# Altium PCB ESP32P4 SOM.PcbDoc (part 1 of 4)
Units mm, origin at the board's own origin, x right, y up, seen from the top; angles counter-clockwise.
Board outline 86.37 x 63.05 mm, 4 copper layers (L1-TOP, L2-GND, L3-GND/PWR, L4-BOT), stack 1.57 mm thick; 203 components, 172 nets, 736 pads, 1001 vias.
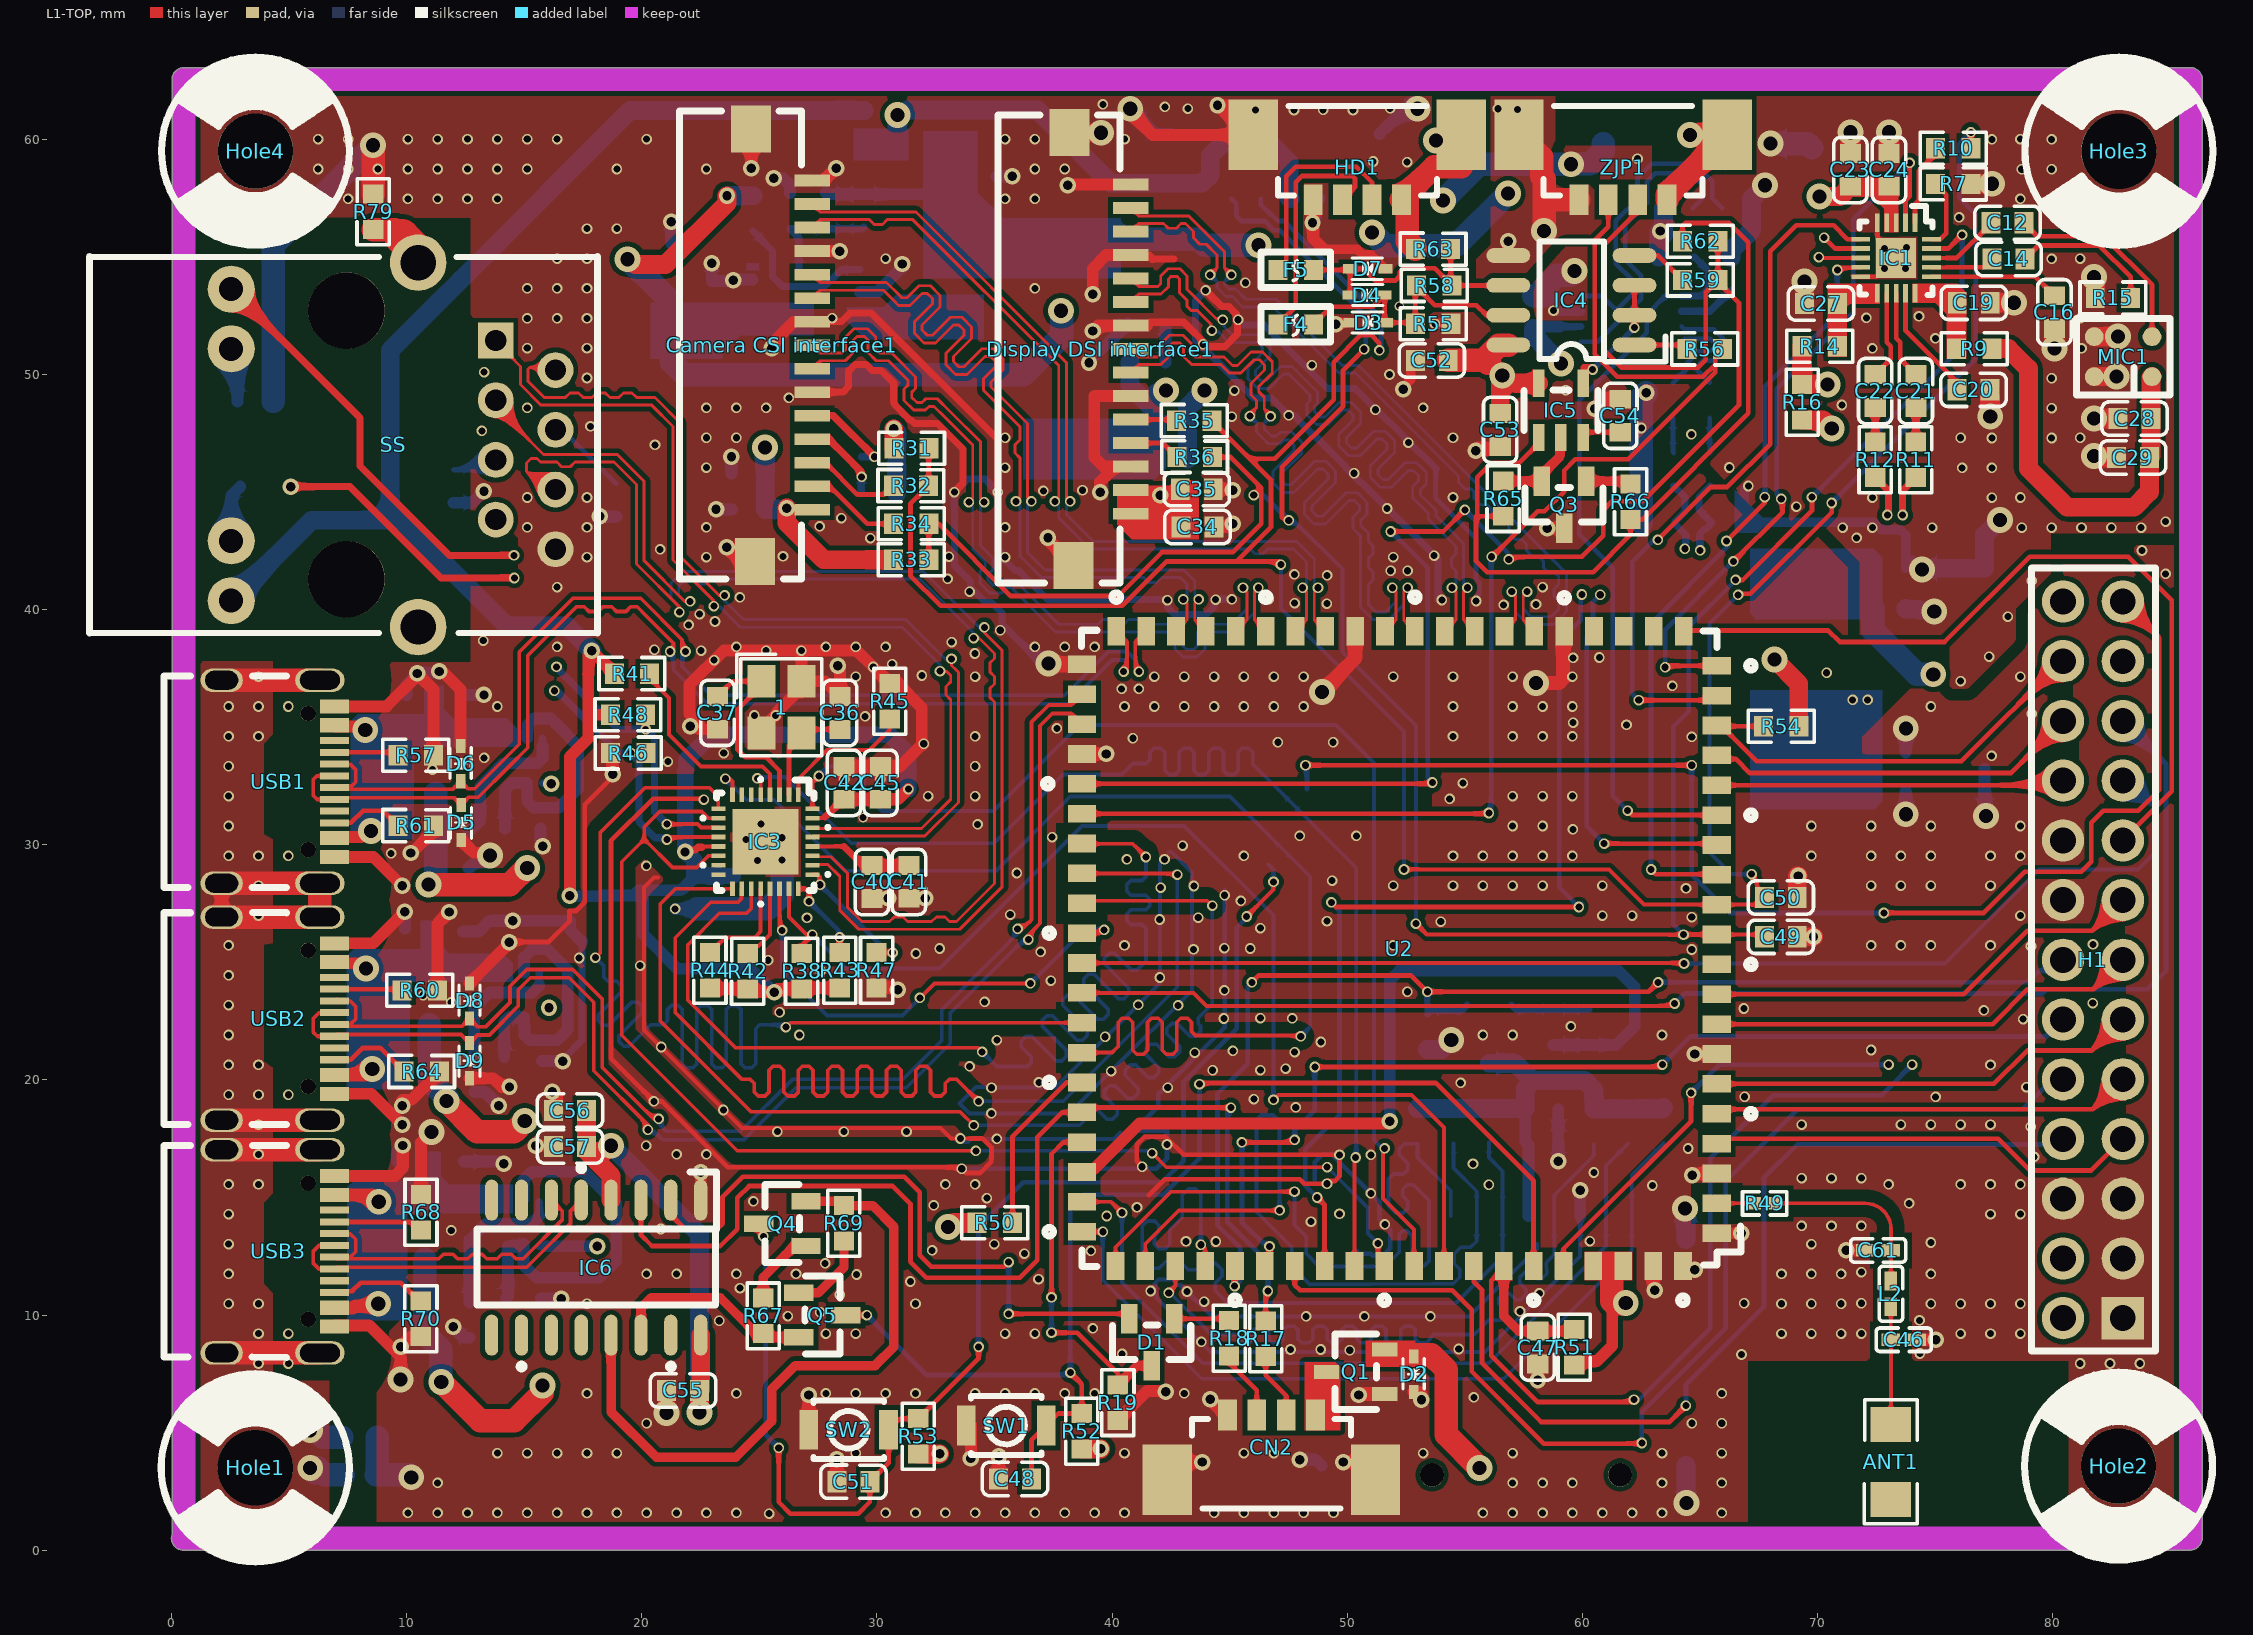
[diagram p0: L1-TOP view]
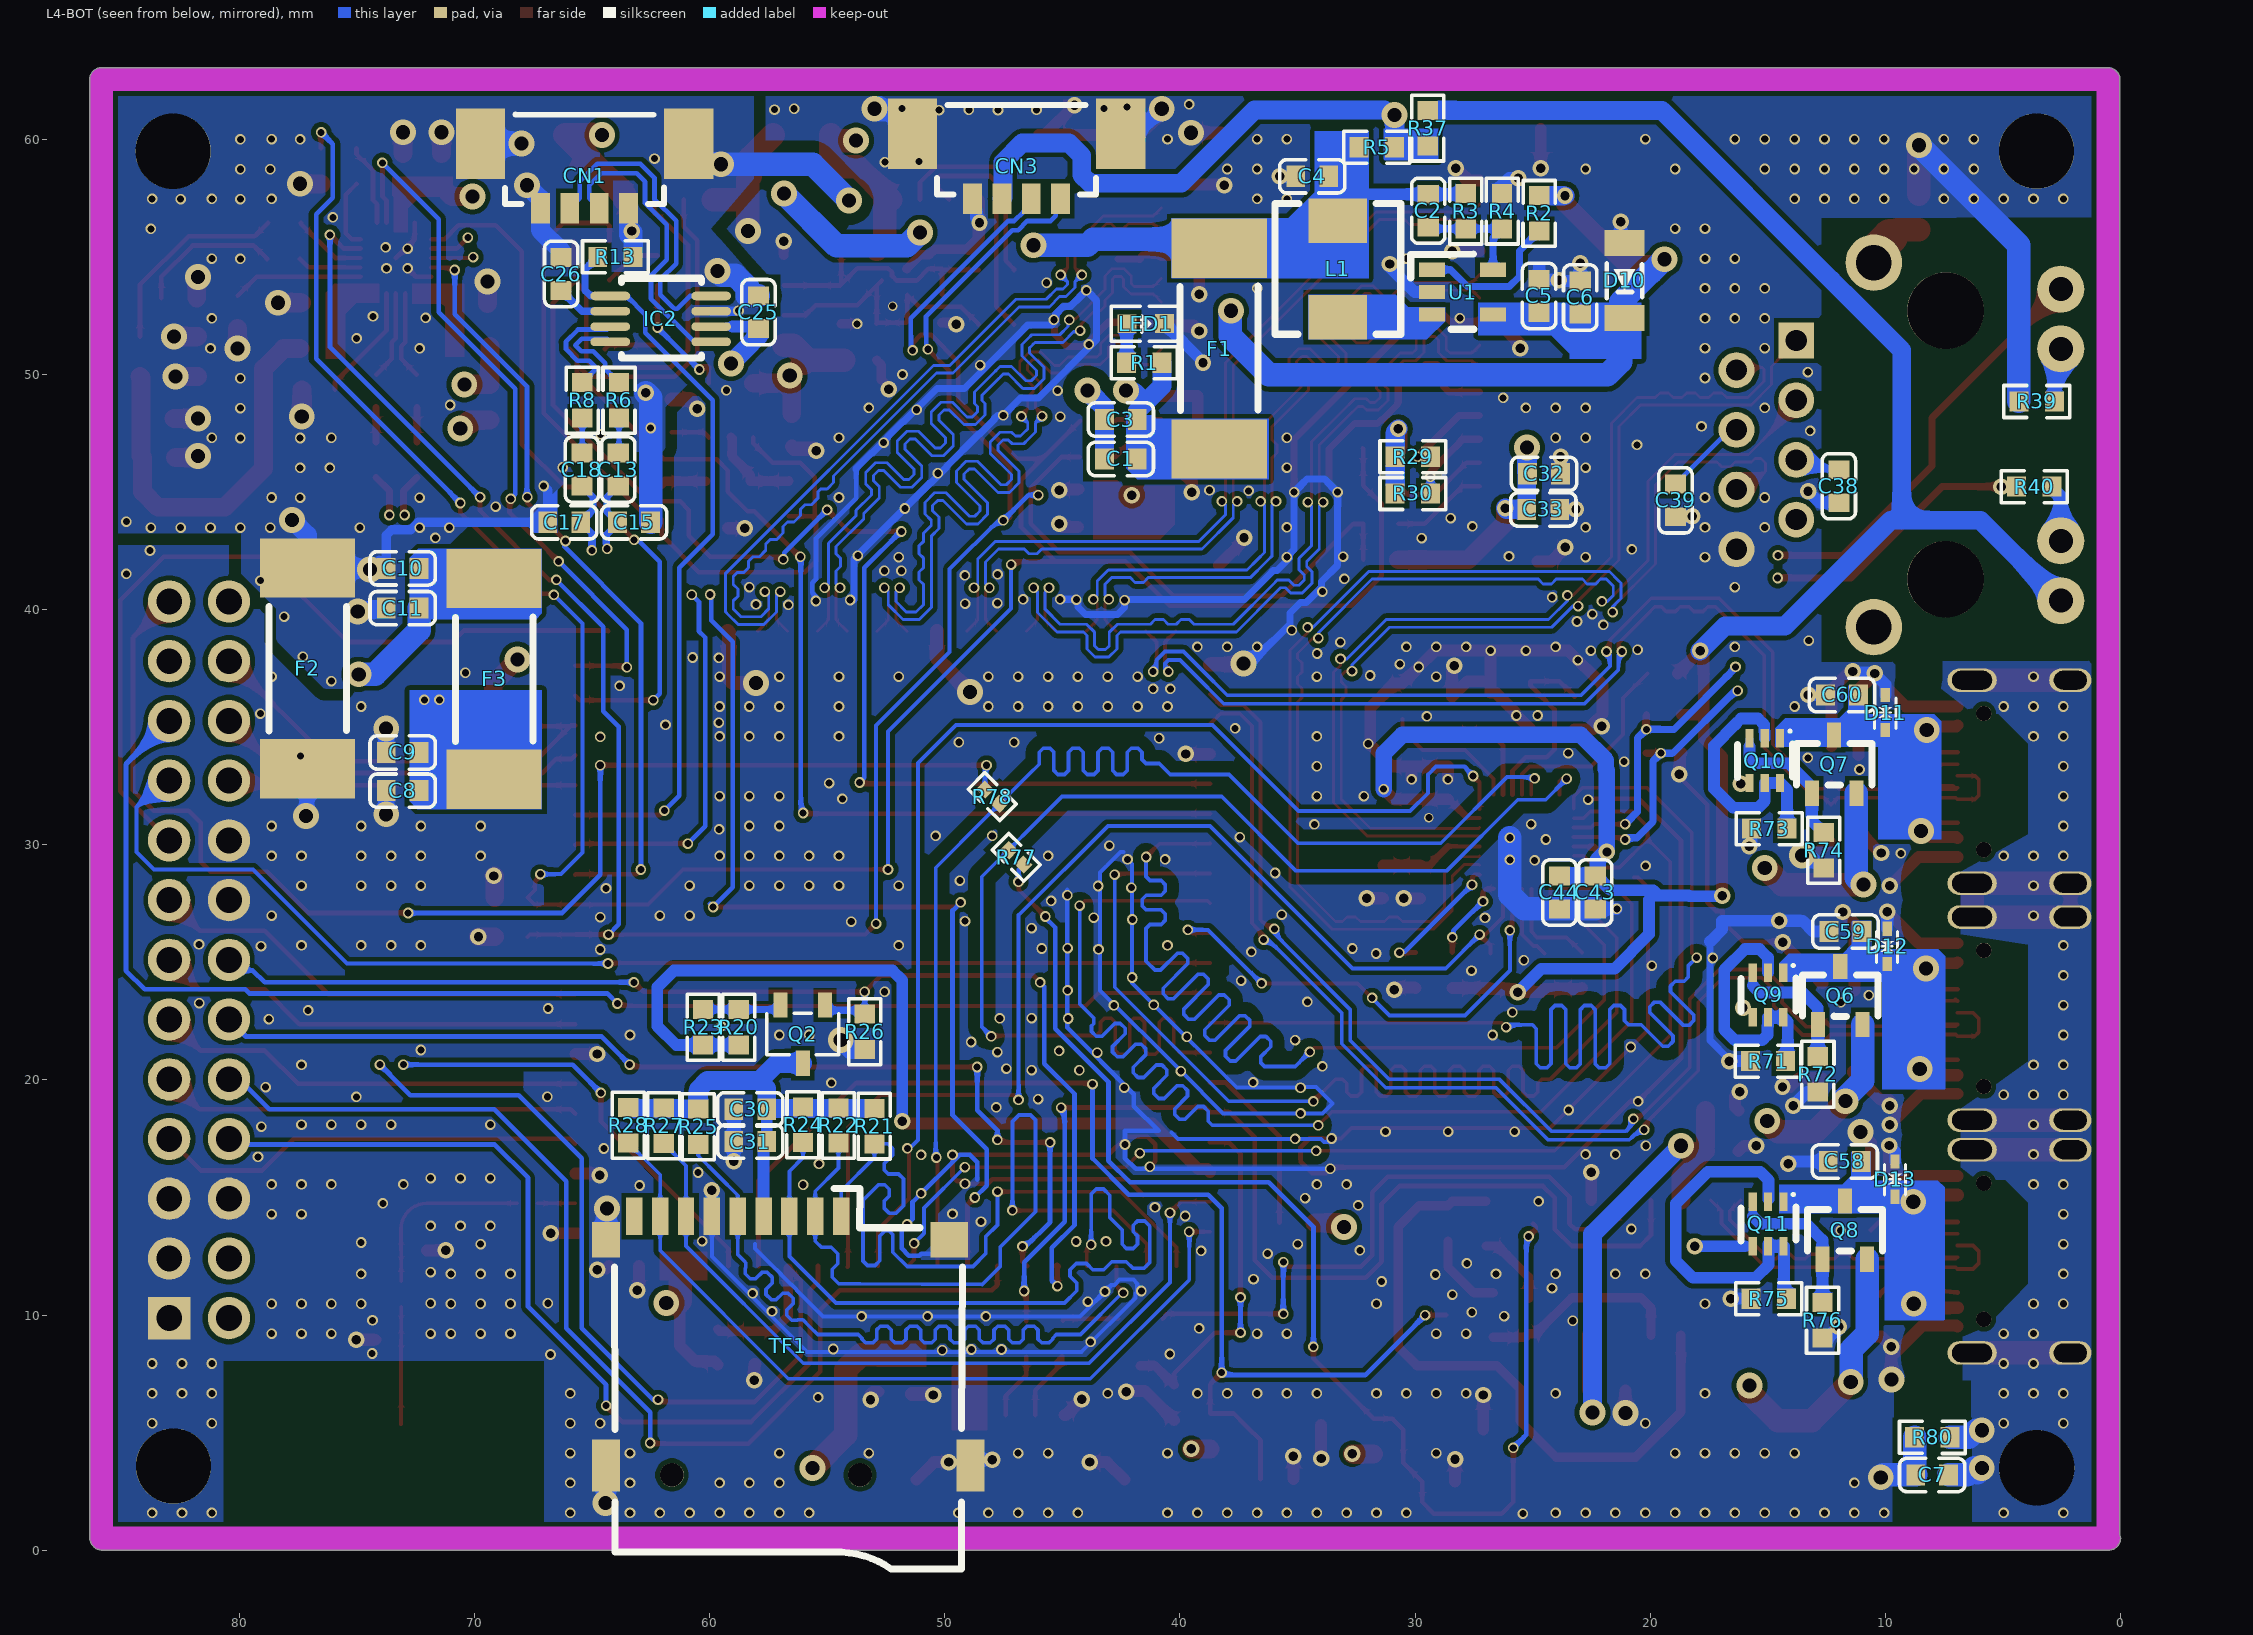
[diagram p1: L4-BOT view, seen from below]
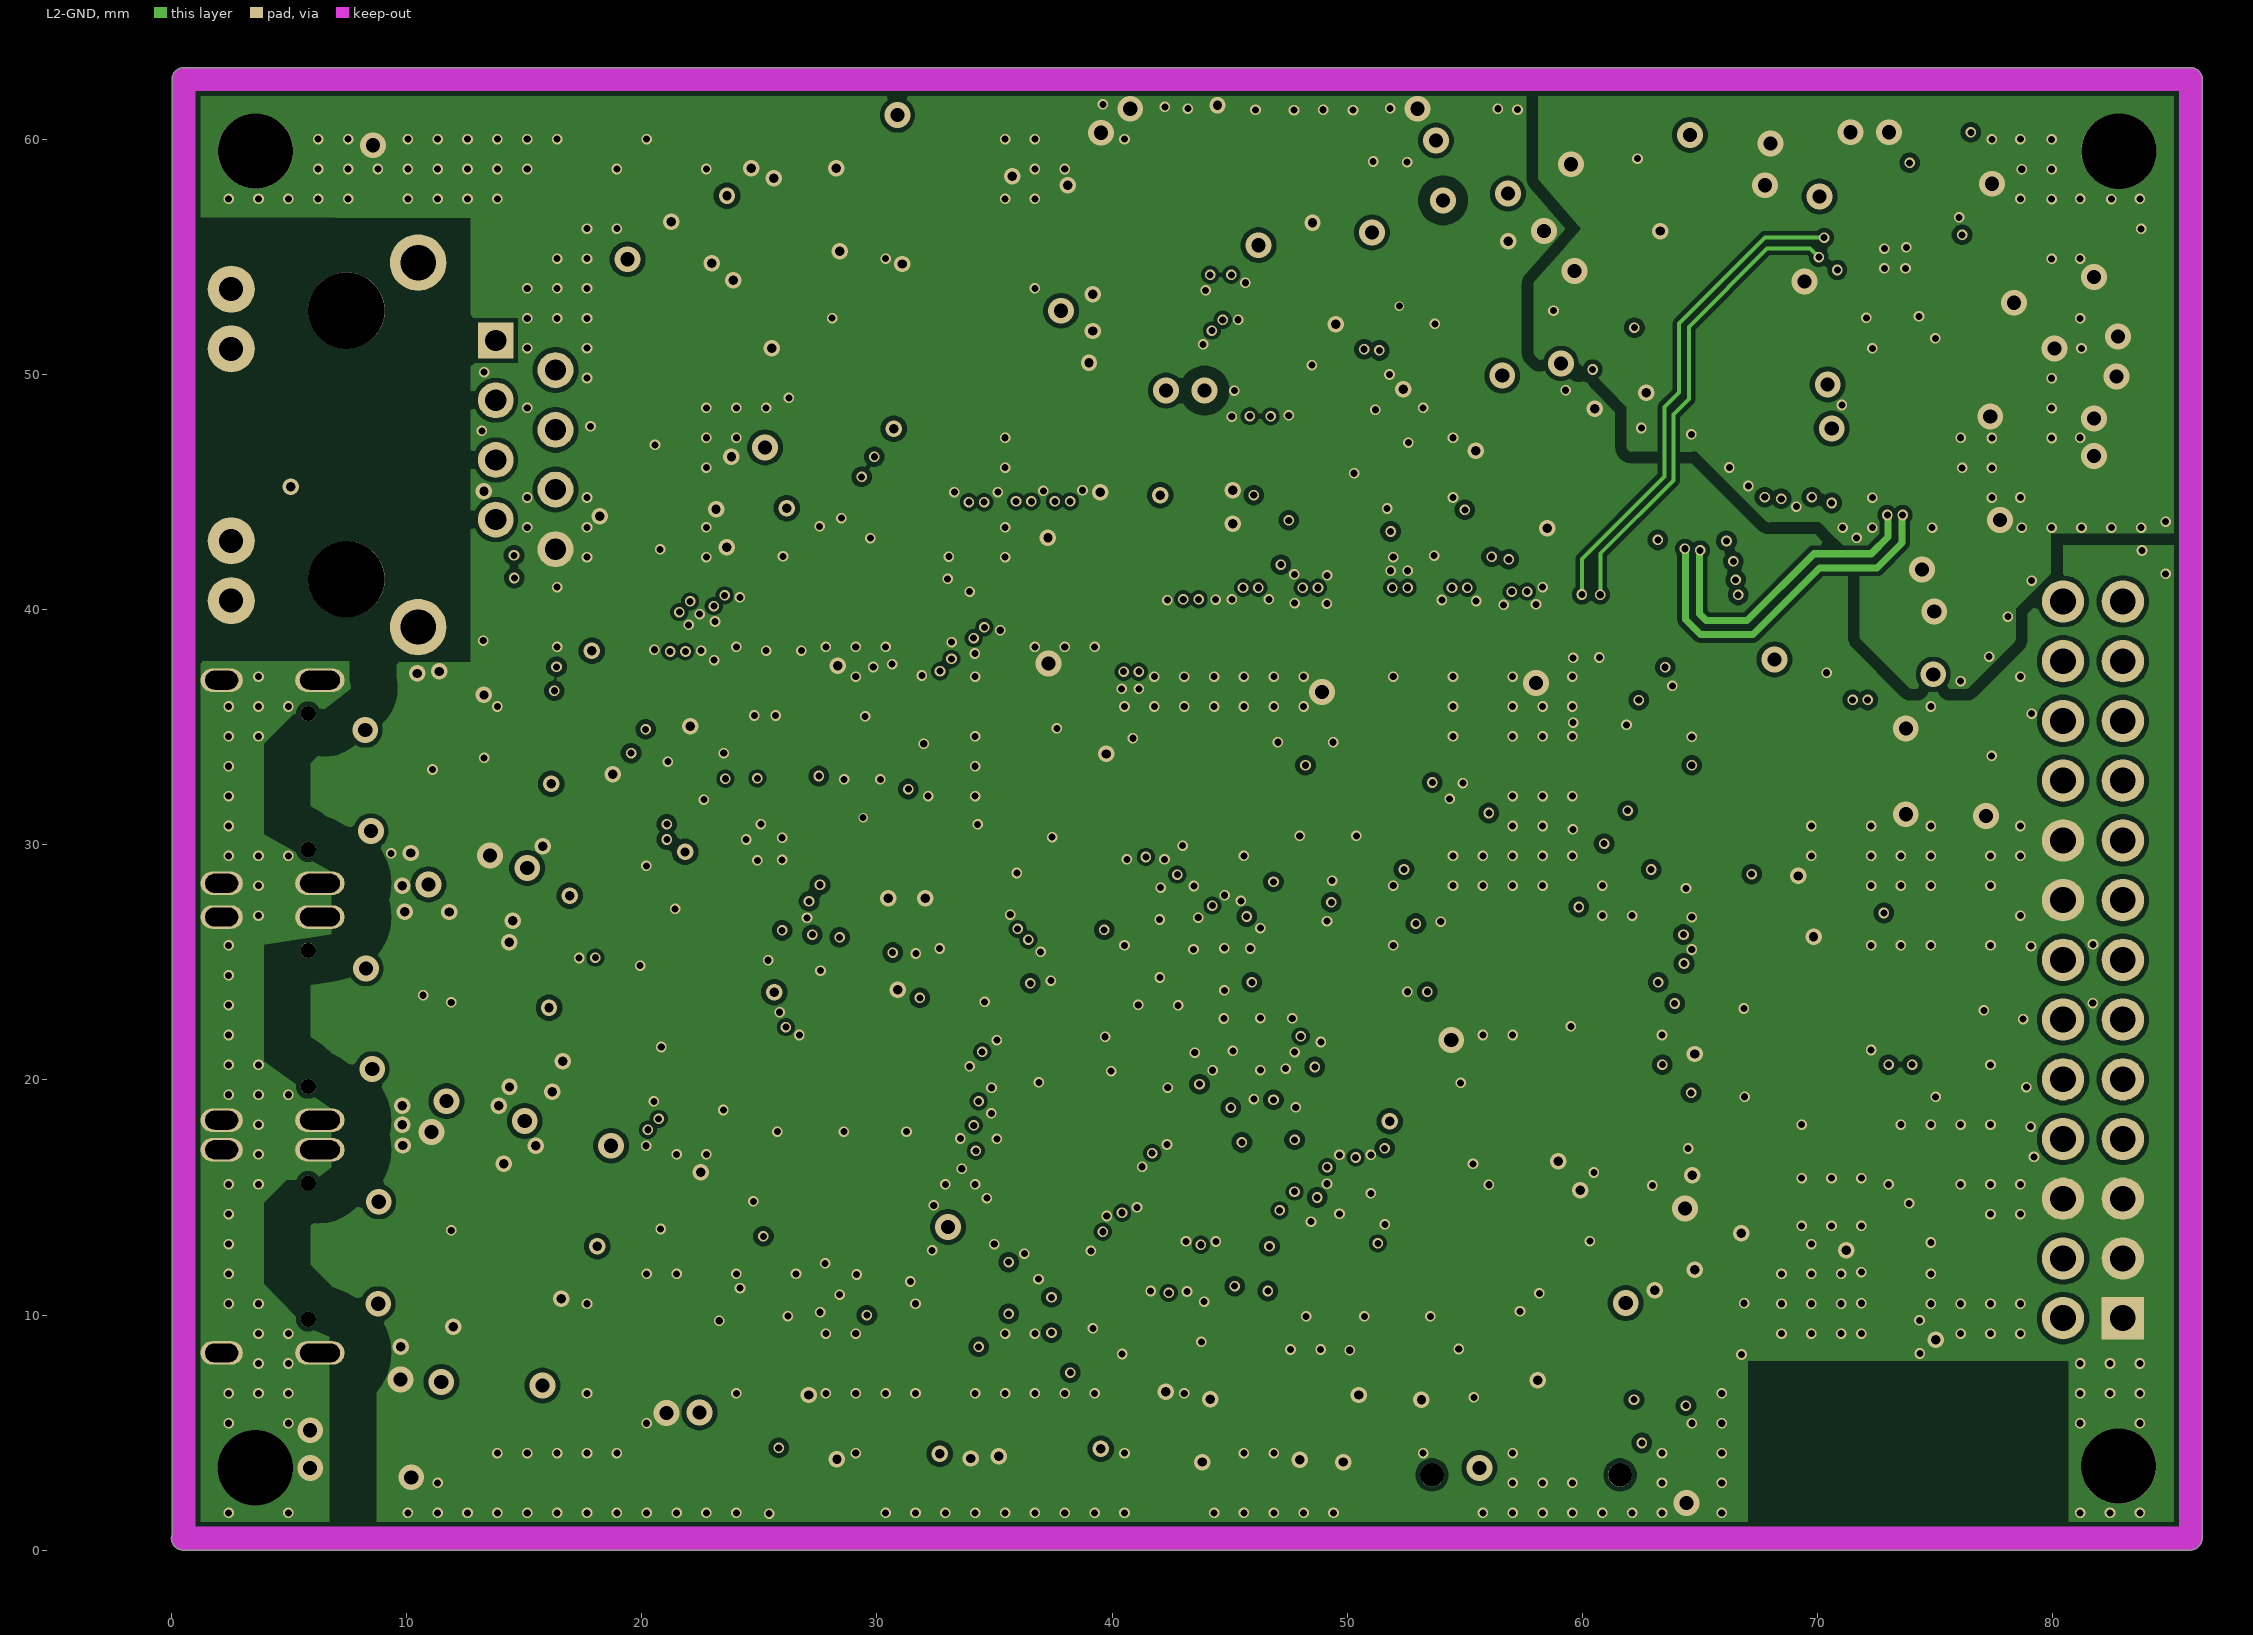
[diagram p2: L2-GND]
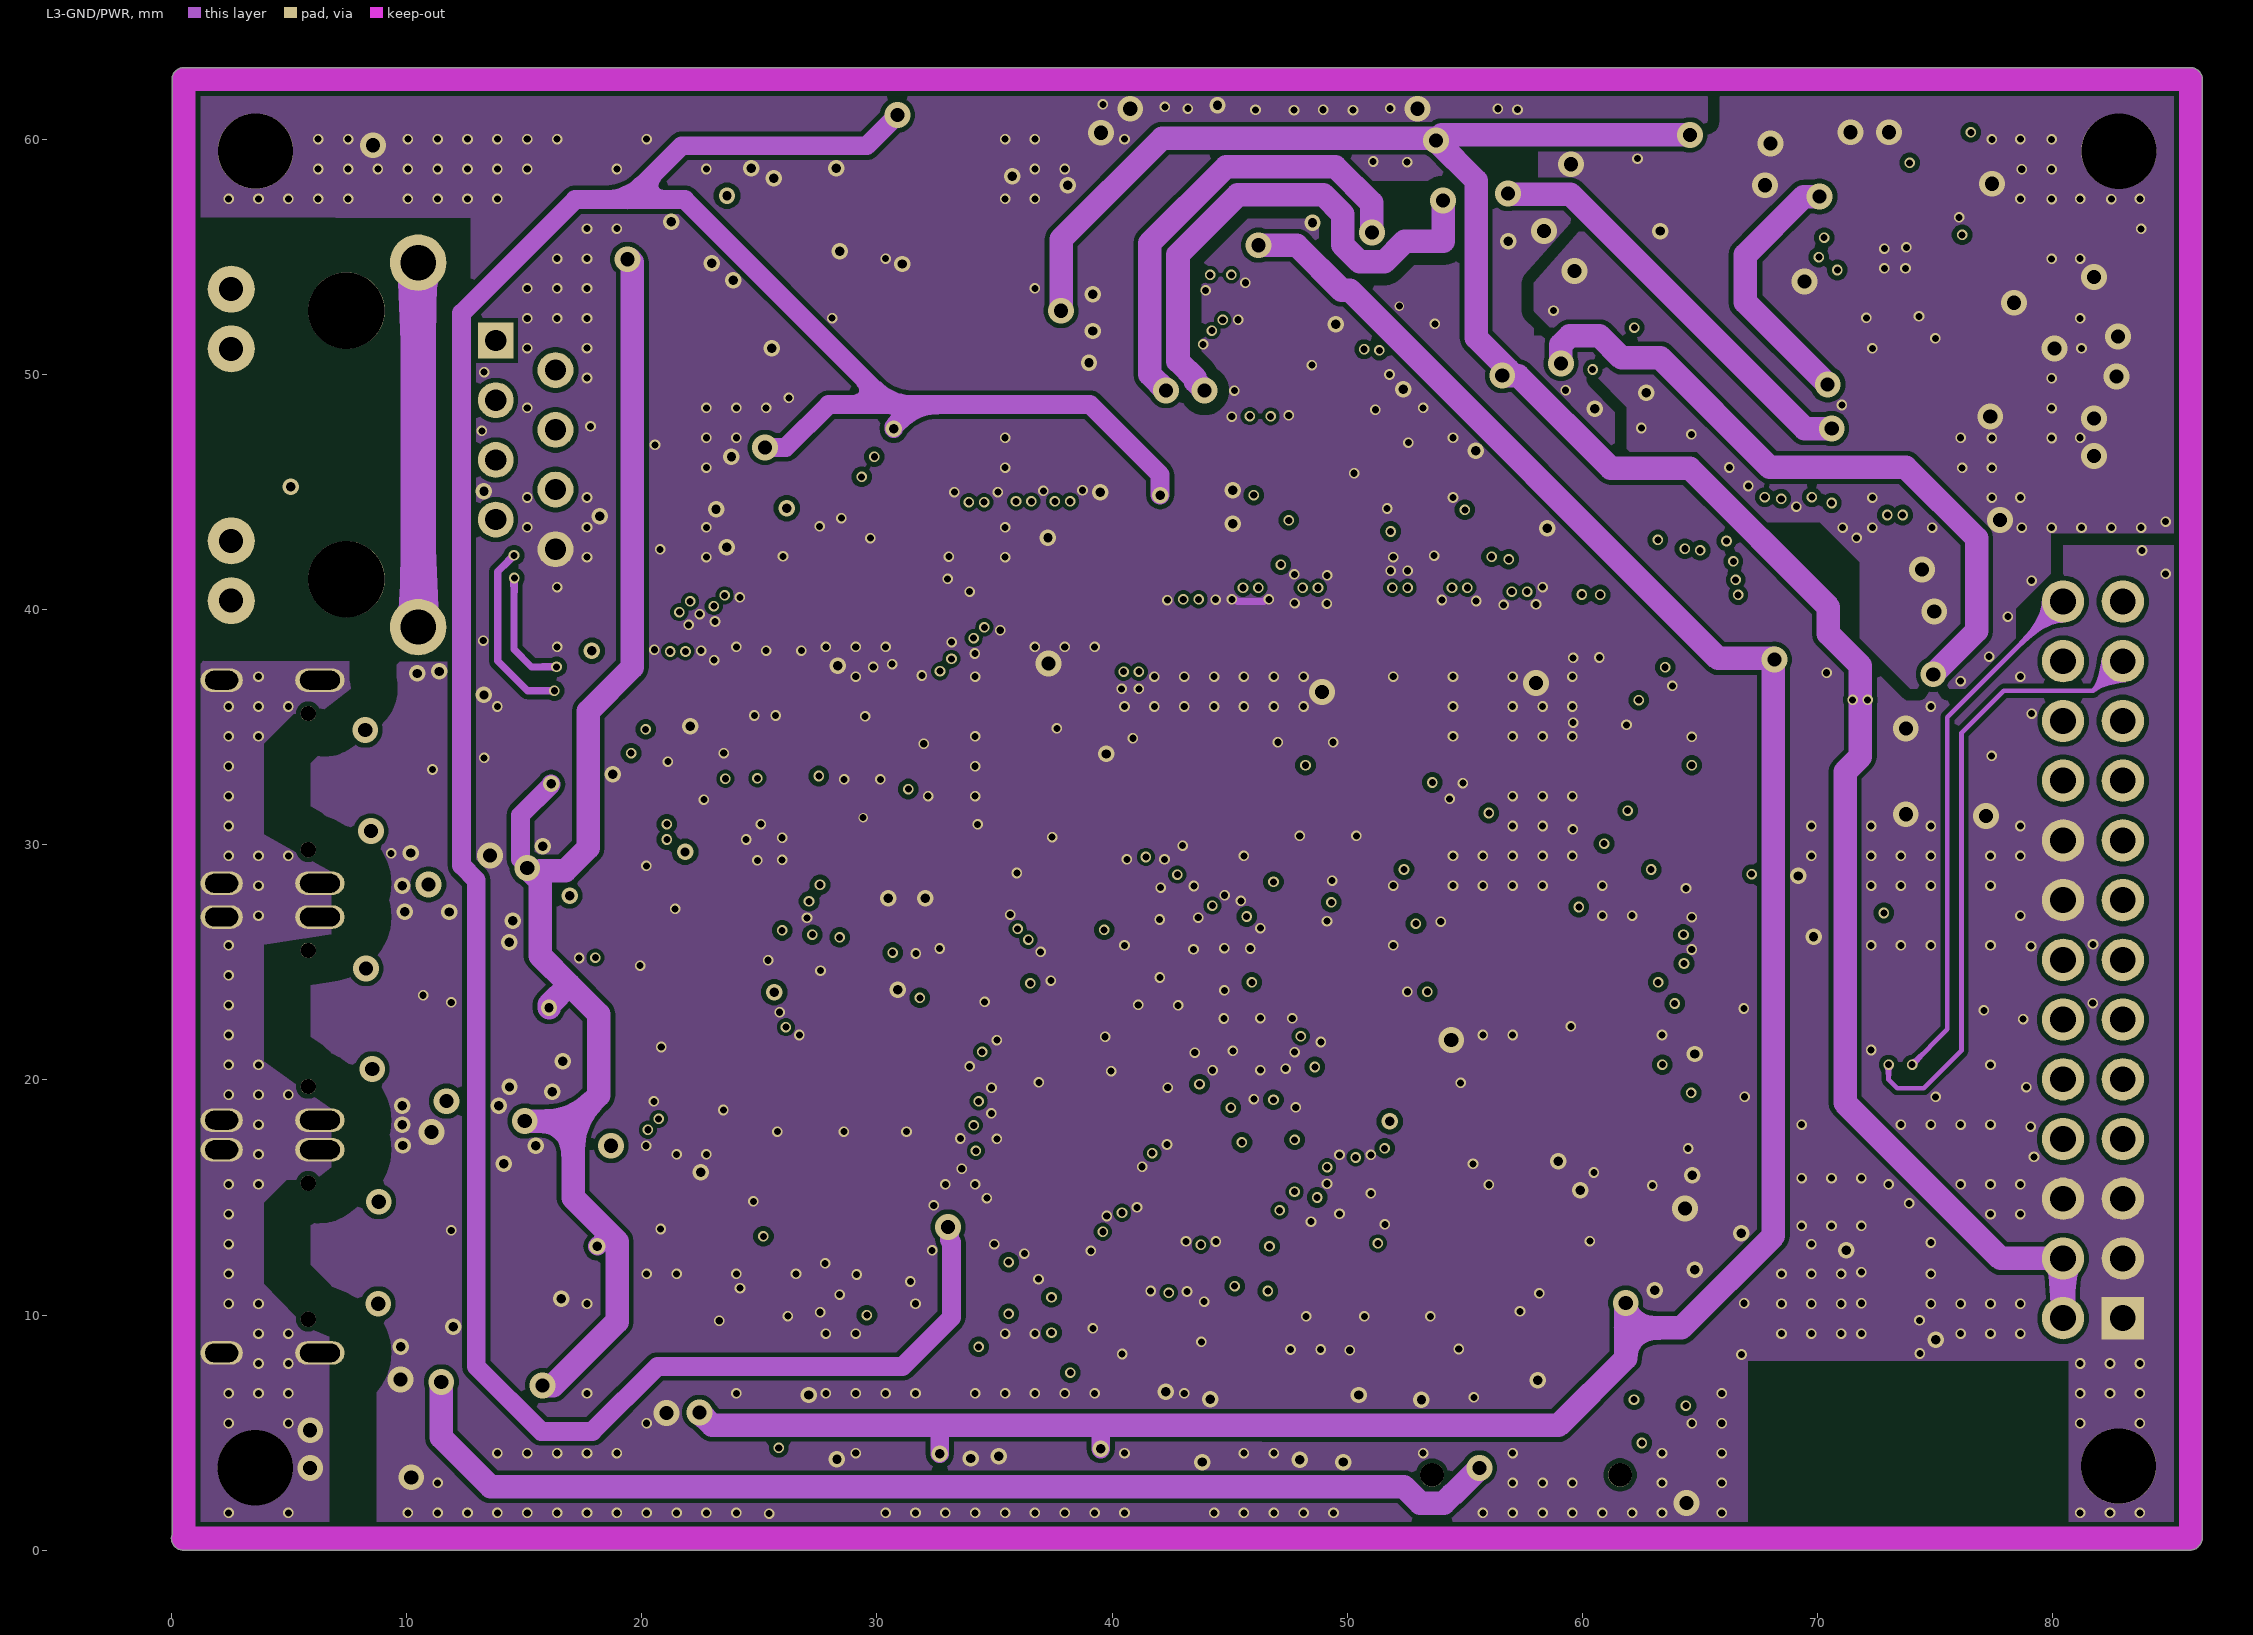
[diagram p3: L3-GND/PWR]
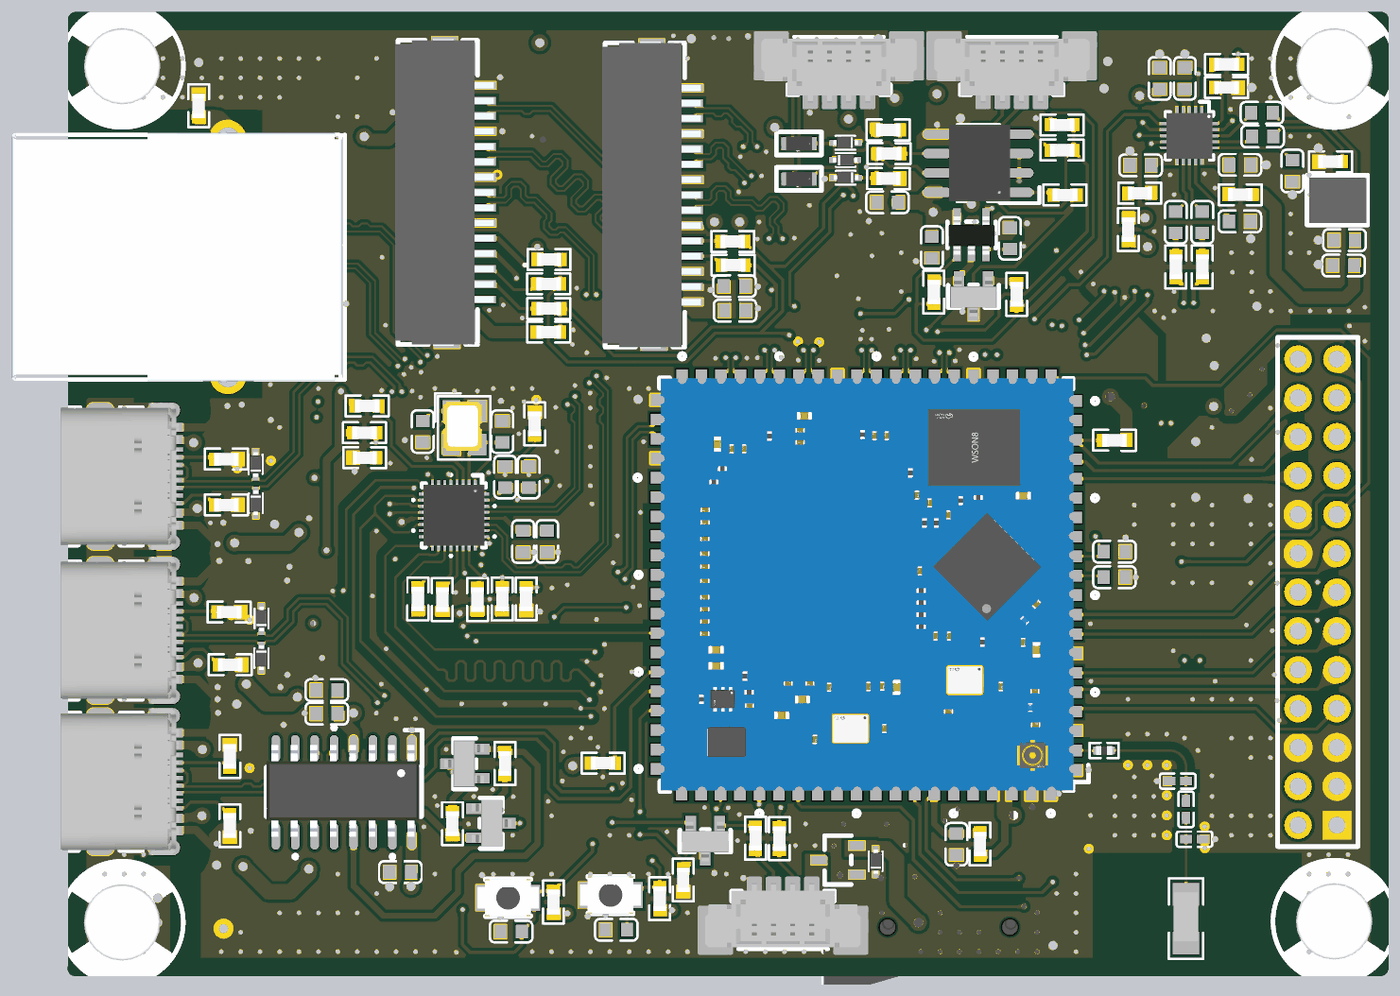
[diagram p7: 3D render of the assembled board from above, using the file's embedded part models]
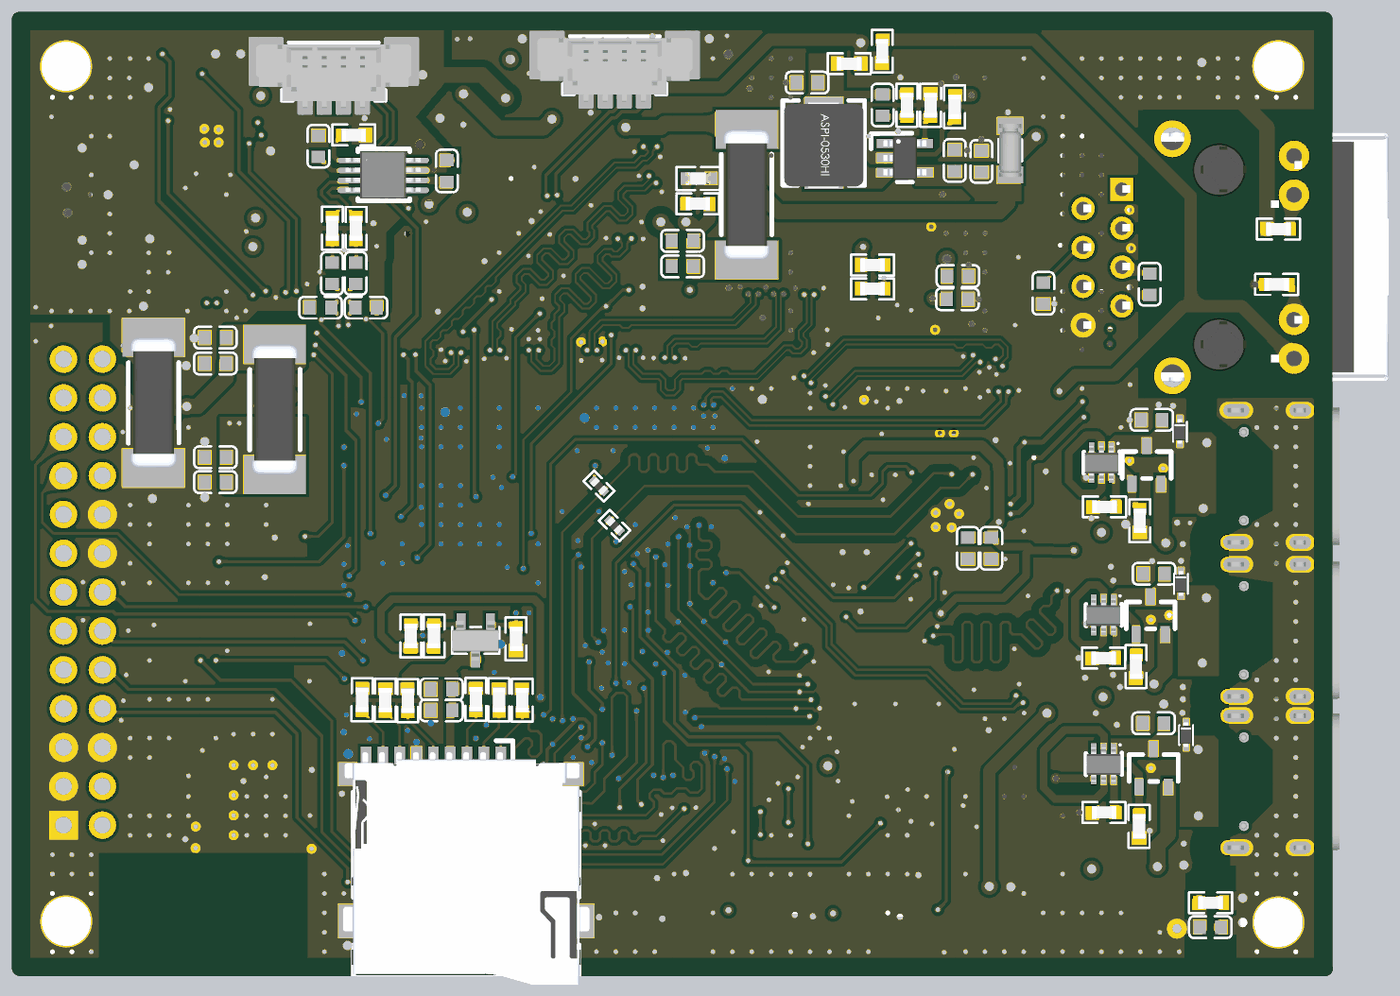
[diagram p8: 3D render of the assembled board from below, using the file's embedded part models]

## Layer stack, top to bottom
Top Solder: solder mask 0.0102, Solder Resist, Dk 3.5
L1-TOP: signal copper 0.0356
Dielectric 2: prepreg 0.0994, 3313*1, Dk 4.4
L2-GND: signal copper 0.0175
Dielectric 3: core 1.265, PP-006, Dk 4.1
L3-GND/PWR: signal copper 0.0175
Dielectric 1: prepreg 0.0994, 3313*1, Dk 4.4
L4-BOT: signal copper 0.0356
Bottom Solder: solder mask 0.0102, Solder Resist, Dk 3.5

## Board outline
0.501,0.004 cw(c0.501,0.504) 0.026,0.66 0.026,62.55 cw(c0.526,62.55) 0.526,63.05 85.87,63.05 cw(c85.87,62.55) 86.37,62.55 86.37,0.55 cw(c85.87,0.55) 86.296,0.288 cw(c85.845,0.504) 85.845,0.004

## Design rules (kind name [scope] priority, off if disabled: settings)
Clearance Clearance_GNDTOAGND [InNet('AGND') vs InNet('GND')] p1: gap=0.2 ignorepadtopadclearanceinfootprint=TRUE except(0.503: Arc-Fill Arc-Poly Arc-Region Track-Fill Track-Poly Track-Region SMDPad-Fill SMDPad-Poly SMDPad-Region THPad-Fill THPad-Poly THPad-Region Via-Fill Via-Poly Via-Region Fill-Fill Fill-Poly Fill-Region Poly-Poly Poly-Region Region-Region)
Clearance Clearance_SHIELDGND [InNet('SHIELDGND') vs InNet('GND')] p2: gap=0.2 ignorepadtopadclearanceinfootprint=TRUE except(0.203: Arc-Fill Arc-Poly Arc-Region Track-Fill Track-Poly Track-Region; 2: SMDPad-Fill SMDPad-Poly SMDPad-Region THPad-Fill THPad-Poly THPad-Region Via-Fill Via-Poly Via-Region Fill-Fill Fill-Poly Fill-Region Poly-Poly Poly-Region Region-Region)
Clearance Clearance_TOVIAHIGHSPEED [InNetClass('DIFF100')or InNetClass('DIFF90')or InNetClass('ETH_PHY')or InNetClass('MIPI')or InNetClass('SDIO_BUS50')or InNetClass('USB') vs OnLayer('L2-GND') OR OnLayer('L3-GND/PWR')] p3: gap=0.2 ignorepadtopadclearanceinfootprint=TRUE except(0.15: Via-Fill Via-Poly Via-Region; 0.203: Arc-Fill Arc-Poly Arc-Region Track-Fill Track-Poly Track-Region SMDPad-Fill SMDPad-Poly SMDPad-Region THPad-Fill THPad-Poly THPad-Region Fill-Fill Fill-Poly Fill-Region Poly-Poly Poly-Region Region-Region)
Clearance Clearance_ANTENNA [InNetClass('ANTENNA') vs InNet('GND')] p4: gap=0.2 ignorepadtopadclearanceinfootprint=TRUE except(0.508: Arc-Fill Arc-Poly Arc-Region Track-Fill Track-Poly Track-Region SMDPad-Fill SMDPad-Poly SMDPad-Region THPad-Fill THPad-Poly THPad-Region Via-Fill Via-Poly Via-Region Fill-Fill Fill-Poly Fill-Region Poly-Poly Poly-Region Region-Region)
Clearance Clearance_RMII [InNetClass('RMII_BUS50') vs InNet('GND')] p5: gap=0.2 ignorepadtopadclearanceinfootprint=TRUE except(0.15: Via-Fill Via-Poly Via-Region; 0.508: Arc-Fill Arc-Poly Arc-Region Track-Fill Track-Poly Track-Region SMDPad-Fill SMDPad-Poly SMDPad-Region THPad-Fill THPad-Poly THPad-Region Fill-Fill Fill-Poly Fill-Region Poly-Poly Poly-Region Region-Region)
Clearance [All] p6: gap=0.2 ignorepadtopadclearanceinfootprint=TRUE except(0.203: Arc-Fill Arc-Poly Arc-Region Track-Fill Track-Poly Track-Region SMDPad-Fill SMDPad-Poly SMDPad-Region THPad-Fill THPad-Poly THPad-Region Via-Fill Via-Poly Via-Region Fill-Fill Fill-Poly Fill-Region Poly-Poly Poly-Region Region-Region)
DiffPairsRouting DiffPair_100DiffPairsRouting [InDifferentialPair ('DSI_A_CLK') Or InDifferentialPair ('DSI_A_DATA0') Or InDifferentialPair ('DSI_A_DATA1') Or InDifferentialPair ('RD') Or InDifferentialPair ('TD') Or InDifferentialPair ('CSI_A_DATA0') Or InDifferentialPair ('CSI_A_CLK') Or InDifferentialPair ('CSI_A_DATA1')] p1: maxlimit=0.203 minlimit=0.203 mostfreqgap=0.203 toplayer_minwidth=0.122 toplayer_maxwidth=0.124 toplayer_prefwidth=0.122 midlayer1_minwidth=0.122 midlayer1_maxwidth=0.124 midlayer1_prefwidth=0.122 midlayer2_minwidth=0.122 midlayer2_maxwidth=0.124 midlayer2_prefwidth=0.122 bottomlayer_minwidth=0.122 bottomlayer_maxwidth=0.124 bottomlayer_prefwidth=0.122 maxuncoupledlength=12.7
DiffPairsRouting DiffPairsRouting_1 [InDifferentialPair ('CSI_A_DATA1')] p2: maxlimit=0.254 minlimit=0.254 mostfreqgap=0.254 toplayer_minwidth=0.381 toplayer_maxwidth=0.381 toplayer_prefwidth=0.381 midlayer1_minwidth=0.381 midlayer1_maxwidth=0.381 midlayer1_prefwidth=0.381 midlayer2_minwidth=0.381 midlayer2_maxwidth=0.381 midlayer2_prefwidth=0.381 bottomlayer_minwidth=0.381 bottomlayer_maxwidth=0.381 bottomlayer_prefwidth=0.381 maxuncoupledlength=12.7
DiffPairsRouting DiffPair_diff100DiffPairsRouting [InDifferentialPairClass('DIFF100')] p3: maxlimit=5 minlimit=0.203 mostfreqgap=0.203 toplayer_minwidth=0.122 toplayer_maxwidth=0.124 toplayer_prefwidth=0.122 midlayer1_minwidth=0.122 midlayer1_maxwidth=0.124 midlayer1_prefwidth=0.122 midlayer2_minwidth=0.122 midlayer2_maxwidth=0.124 midlayer2_prefwidth=0.122 bottomlayer_minwidth=0.122 bottomlayer_maxwidth=0.124 bottomlayer_prefwidth=0.122 maxuncoupledlength=12.7
DiffPairsRouting DiffPair_diff90DiffPairsRouting [InDifferentialPairClass('DIFF90')] p4: maxlimit=5 minlimit=0.203 mostfreqgap=0.203 toplayer_minwidth=0.155 toplayer_maxwidth=0.158 toplayer_prefwidth=0.155 midlayer1_minwidth=0.155 midlayer1_maxwidth=0.158 midlayer1_prefwidth=0.155 midlayer2_minwidth=0.155 midlayer2_maxwidth=0.158 midlayer2_prefwidth=0.155 bottomlayer_minwidth=0.155 bottomlayer_maxwidth=0.158 bottomlayer_prefwidth=0.155 maxuncoupledlength=12.7
DiffPairsRouting DiffPair_DACOUTDiffPairsRouting [InDifferentialPair ('DAC_OUT')] p5: maxlimit=0.3 minlimit=0.2 mostfreqgap=0.3 toplayer_minwidth=0.2 toplayer_maxwidth=0.3 toplayer_prefwidth=0.3 midlayer1_minwidth=0.2 midlayer1_maxwidth=0.3 midlayer1_prefwidth=0.3 midlayer2_minwidth=0.2 midlayer2_maxwidth=0.3 midlayer2_prefwidth=0.3 bottomlayer_minwidth=0.2 bottomlayer_maxwidth=0.3 bottomlayer_prefwidth=0.3 maxuncoupledlength=12.7
DiffPairsRouting DiffPair_ADC_MICDiffPairsRouting [InDifferentialPair ('ADC_MIC1')] p6: maxlimit=0.381 minlimit=0.2 mostfreqgap=0.2 toplayer_minwidth=0.2 toplayer_maxwidth=0.381 toplayer_prefwidth=0.2 midlayer1_minwidth=0.2 midlayer1_maxwidth=0.381 midlayer1_prefwidth=0.2 midlayer2_minwidth=0.2 midlayer2_maxwidth=0.381 midlayer2_prefwidth=0.2 bottomlayer_minwidth=0.2 bottomlayer_maxwidth=0.381 bottomlayer_prefwidth=0.2 maxuncoupledlength=12.7
DiffPairsRouting DiffPair_OUTDiffPairsRouting [InDifferentialPair ('OUT')] p7: maxlimit=0.381 minlimit=0.2 mostfreqgap=0.2 toplayer_minwidth=0.2 toplayer_maxwidth=0.381 toplayer_prefwidth=0.2 midlayer1_minwidth=0.2 midlayer1_maxwidth=0.381 midlayer1_prefwidth=0.2 midlayer2_minwidth=0.2 midlayer2_maxwidth=0.381 midlayer2_prefwidth=0.2 bottomlayer_minwidth=0.2 bottomlayer_maxwidth=0.381 bottomlayer_prefwidth=0.2 maxuncoupledlength=12.7
DiffPairsRouting DiffPair_PADiffPairsRouting [InDifferentialPair ('PA_INL')] p8: maxlimit=0.3 minlimit=0.2 mostfreqgap=0.2 toplayer_minwidth=0.2 toplayer_maxwidth=0.3 toplayer_prefwidth=0.2 midlayer1_minwidth=0.2 midlayer1_maxwidth=0.3 midlayer1_prefwidth=0.2 midlayer2_minwidth=0.2 midlayer2_maxwidth=0.3 midlayer2_prefwidth=0.2 bottomlayer_minwidth=0.2 bottomlayer_maxwidth=0.3 bottomlayer_prefwidth=0.2 maxuncoupledlength=12.7
DiffPairsRouting DiffPair_SPEAKERDiffPairsRouting [InDifferentialPair ('SPEAKER')] p9: maxlimit=0.3 minlimit=0.2 mostfreqgap=0.2 toplayer_minwidth=0.2 toplayer_maxwidth=0.3 toplayer_prefwidth=0.2 midlayer1_minwidth=0.2 midlayer1_maxwidth=0.3 midlayer1_prefwidth=0.2 midlayer2_minwidth=0.2 midlayer2_maxwidth=0.3 midlayer2_prefwidth=0.2 bottomlayer_minwidth=0.2 bottomlayer_maxwidth=0.3 bottomlayer_prefwidth=0.2 maxuncoupledlength=12.7
DiffPairsRouting [All] p10: maxlimit=0.254 minlimit=0.254 mostfreqgap=0.254 toplayer_minwidth=0.381 toplayer_maxwidth=0.381 toplayer_prefwidth=0.381 midlayer1_minwidth=0.381 midlayer1_maxwidth=0.381 midlayer1_prefwidth=0.381 midlayer2_minwidth=0.381 midlayer2_maxwidth=0.381 midlayer2_prefwidth=0.381 bottomlayer_minwidth=0.381 bottomlayer_maxwidth=0.381 bottomlayer_prefwidth=0.381 maxuncoupledlength=12.7
HoleSize [All] p1: absolutevalues=TRUE maxlimit=5 minlimit=0.025 maxpercent=80.000 minpercent=20.000
HoleToHoleClearance [All] p1: gap=0.2 allowstackedmicrovias=TRUE
MatchedLengths MatchedLengths_SDIO [InNetClass('SDIO_BUS50')] p1: tolerance=1.27 checknetsindiffpair=FALSE checkdiffpairvsdiffpair=TRUE checkxsignals=TRUE checkothers=TRUE
MatchedLengths DiffPair_100MatchedLengths [InDifferentialPair ('DSI_A_CLK') Or InDifferentialPair ('DSI_A_DATA0') Or InDifferentialPair ('DSI_A_DATA1') Or InDifferentialPair ('CSI_A_DATA0') Or InDifferentialPair ('CSI_A_CLK') Or InDifferentialPair ('CSI_A_DATA1')] p2: tolerance=0.254 checknetsindiffpair=TRUE checkdiffpairvsdiffpair=FALSE checkxsignals=FALSE checkothers=FALSE
MatchedLengths [InDifferentialPair ('CSI_A_DATA1')] p3: tolerance=25.4 checknetsindiffpair=FALSE checkdiffpairvsdiffpair=TRUE checkxsignals=TRUE checkothers=TRUE
MatchedLengths MatchedLengths_RMII [InNetClass('RMII_BUS50')] p4: tolerance=5.11 checknetsindiffpair=FALSE checkdiffpairvsdiffpair=TRUE checkxsignals=TRUE checkothers=TRUE
MatchedLengths DiffPair_diff100MatchedLengths [InDifferentialPairClass('DIFF100')] p5: tolerance=0.5 checknetsindiffpair=TRUE checkdiffpairvsdiffpair=FALSE checkxsignals=FALSE checkothers=FALSE
MatchedLengths DiffPair_diff90MatchedLengths [InDifferentialPairClass('DIFF90')] p6: tolerance=0.15 checknetsindiffpair=TRUE checkdiffpairvsdiffpair=FALSE checkxsignals=FALSE checkothers=FALSE
MatchedLengths DiffPair_DACOUTMatchedLengths [InDifferentialPair ('DAC_OUT')] p7: tolerance=10 checknetsindiffpair=TRUE checkdiffpairvsdiffpair=FALSE checkxsignals=FALSE checkothers=FALSE
MatchedLengths DiffPair_ADC_MICMatchedLengths [InDifferentialPair ('ADC_MIC1')] p8: tolerance=10 checknetsindiffpair=TRUE checkdiffpairvsdiffpair=FALSE checkxsignals=FALSE checkothers=FALSE
MatchedLengths DiffPair_OUTMatchedLengths [InDifferentialPair ('OUT')] p9: tolerance=10 checknetsindiffpair=TRUE checkdiffpairvsdiffpair=FALSE checkxsignals=FALSE checkothers=FALSE
MatchedLengths DiffPair_PAMatchedLengths [InDifferentialPair ('PA_INL')] p10: tolerance=10 checknetsindiffpair=TRUE checkdiffpairvsdiffpair=FALSE checkxsignals=FALSE checkothers=FALSE
MatchedLengths DiffPair_SPEAKERMatchedLengths [InDifferentialPair ('SPEAKER')] p11: tolerance=10 checknetsindiffpair=TRUE checkdiffpairvsdiffpair=FALSE checkxsignals=FALSE checkothers=FALSE
MinimumSolderMaskSliver [All] p1: minsoldermaskwidth=0.1
PlaneConnect [All] p1: planeconnectstyle=Direct reliefexpansion=0.508 reliefentries=4 reliefconductorwidth=0.254 reliefairgap=0.254
PolygonConnect [All] p1: connectstyle=Direct reliefconductorwidth=0.254 reliefentries=4 polygonreliefangle="90 Angle" airgapwidth=0.254
RoutingVias RoutingVias_PWR [All] p1: holewidth=0.4 width=0.7 viastyle="Through Hole" minholewidth=0.3 minwidth=0.4 maxholewidth=0.6 maxwidth=1.1
RoutingVias [All] p2: holewidth=0.3 width=0.45 viastyle="Through Hole" minholewidth=0.3 minwidth=0.4 maxholewidth=0.4 maxwidth=0.6
SilkToSilkClearance [All] p1: silktosilkclearance=0
SilkToSolderMaskClearance [IsPad] p1: minsilkscreentomaskgap=0.1 clearancetoexposedcopper=TRUE
SolderMaskExpansion [All] p1: expansion=0.102 istentingtop=FALSE
SupplyNets "Schematic Supply Nets_10" [InNet('GNDETH')] p1: voltage=0.000
SupplyNets "Schematic Supply Nets_4" [InNet('SHIELDGND')] p2: voltage=0.000
SupplyNets "Schematic Supply Nets_14" [InNet('ESP_3V3')] p3: voltage=0.000
SupplyNets "Schematic Supply Nets_13" [InNet('TF_VCC')] p4: voltage=0.000
SupplyNets "Schematic Supply Nets_12" [InNet('VDDA')] p5: voltage=0.000
SupplyNets "Schematic Supply Nets_11" [InNet('ESP_LDO_VO4')] p6: voltage=0.000
SupplyNets "Schematic Supply Nets_9" [InNet('CODEC_3V3')] p7: voltage=0.000
SupplyNets "Schematic Supply Nets_8" [InNet('USB1_5V')] p8: voltage=0.000
SupplyNets "Schematic Supply Nets_7" [InNet('USB2_5V')] p9: voltage=0.000
SupplyNets "Schematic Supply Nets_6" [InNet('USB_5V')] p10: voltage=0.000
SupplyNets "Schematic Supply Nets_5" [InNet('VCC3V3')] p11: voltage=0.000
SupplyNets "Schematic Supply Nets_3" [InNet('PHY_3V3')] p12: voltage=0.000
SupplyNets "Schematic Supply Nets_2" [InNet('GND')] p13: voltage=0.000
SupplyNets "Schematic Supply Nets_1" [InNet('AGND')] p14: voltage=0.000
SupplyNets "Schematic Supply Nets" [InNet('USB3_5V')] p15: voltage=0.000
Width Width_ANTENNA [InNetClass('ANTENNA')] p1: maxlimit=0.156 minlimit=0.156 preferedwidth=0.156
Width Width_SDIOBUS50 [InNetClass('SDIO_BUS50')] p2: maxlimit=0.156 minlimit=0.131 preferedwidth=0.137
Width Width_RMII_BUS50 [InNetClass('RMII_BUS50')] p3: maxlimit=0.156 minlimit=0.156 preferedwidth=0.156
Width Width_PWR [InNetClass('PWR')] p4: maxlimit=2 minlimit=0.17 preferedwidth=0.5
Width [All] p5: maxlimit=0.5 minlimit=0.17 preferedwidth=0.2
23 further rules are at their usual default settings.

## Classes and differential pairs
net class ANTENNA: LAN LAN_OUT NetANT1_2
net class PWR: ADC_MICBIAS12 AGND CODEC_3V3 ESP_3V3 GND GNDETH PHY_3V3 SHIELDGND TF_VCC USB1_5V USB2_5V USB3_5V USB_5V VCC3V3 VCC5VA VDDA VIN
differential pair class DIFF: ADC_MIC1 DAC_OUT OUT PA_INL SPEAKER
differential pair class DIFF100: CSI_A_CLK CSI_A_DATA0 CSI_A_DATA1 DSI_A_CLK DSI_A_DATA0 DSI_A_DATA1 RD TD
differential pair class DIFF90: ESP_USB USB USB1P1
net class USB: ESP_USB_N ESP_USB_P GND USB1P1_N USB1P1_P USB_N USB_P
net class SPEAKER: SPEAKER_N SPEAKER_P
net class SDIO_BUS50: SD_CLK SD_CMD SD_DATA0 SD_DATA1 SD_DATA2 SD_DATA3
net class RMII_BUS50: GPIO28 GPIO29 GPIO30 GPIO34 GPIO50 RMII_TXD1 RMII_TXEN
net class MIPI: CSI_A_CLK_N CSI_A_CLK_P CSI_A_DATA0_N CSI_A_DATA0_P CSI_A_DATA1_N CSI_A_DATA1_P DSI_A_CLK_N DSI_A_CLK_P DSI_A_DATA0_N DSI_A_DATA0_P DSI_A_DATA1_N DSI_A_DATA1_P
net class ETH_PHY: RD_N RD_P TD_N TD_P
net class DIFF: ADC_MIC1_N ADC_MIC1_P DAC_OUT_N DAC_OUT_P PA_INL_N PA_INL_P SPEAKER_N SPEAKER_P
net class DIFF100: CSI_A_CLK_N CSI_A_CLK_P CSI_A_DATA0_N CSI_A_DATA0_P CSI_A_DATA1_N CSI_A_DATA1_P DSI_A_CLK_N DSI_A_CLK_P DSI_A_DATA0_N DSI_A_DATA0_P DSI_A_DATA1_N DSI_A_DATA1_P RD_N RD_P TD_N TD_P
net class DIFF90: ESP_USB_N ESP_USB_P USB1P1_N USB1P1_P USB_N USB_P
net class ADC_MIC: ADC_MIC1_N ADC_MIC1_P
component class Designator: C1 C2 C3 C4 C5 C6 C8 C9 C10 C11 D10 F1 F2 F3 L1 LED1 R1 R2 R3 R4 R5 U1
differential pair DAC_OUT: +DAC_OUT_P -DAC_OUT_N
differential pair USB: +USB_P -USB_N
differential pair USB1P1: +USB1P1_P -USB1P1_N
differential pair TD: +TD_P -TD_N
differential pair SPEAKER: +SPEAKER_P -SPEAKER_N
differential pair RD: +RD_P -RD_N
differential pair PA_INL: +PA_INL_P -PA_INL_N
differential pair ESP_USB: +ESP_USB_P -ESP_USB_N
differential pair DSI_A_DATA1: +DSI_A_DATA1_P -DSI_A_DATA1_N
differential pair DSI_A_DATA0: +DSI_A_DATA0_P -DSI_A_DATA0_N
differential pair DSI_A_CLK: +DSI_A_CLK_P -DSI_A_CLK_N
differential pair CSI_A_DATA1: +CSI_A_DATA1_P -CSI_A_DATA1_N
differential pair CSI_A_DATA0: +CSI_A_DATA0_P -CSI_A_DATA0_N
differential pair CSI_A_CLK: +CSI_A_CLK_P -CSI_A_CLK_N
differential pair ADC_MIC1: +ADC_MIC1_P -ADC_MIC1_N

## Components (designator, comment, footprint, x,y, rotation, side; value= is the part's Value field where it differs from the comment)
1 "25MHz" CRYSTAL-SMD_4P-L3.2-W2.5-BL 25.827,35.967 r270 top
ANT1 "RF ANT 2450MHz CERAMIC SMD" ANT-SMD-2_L3.2-W1.6-C504002 73.124,3.776 r90 top
C1 "10uF" C0603 42.516,46.407 r180 bottom
C2 "22pf" C0603 29.442,56.963 r90 bottom
C3 "100nF" C0603 42.516,48.082 r180 bottom
C4 "10uF" C0603 34.375,58.429 r180 bottom
C5 "10uF" C0603 24.726,53.342 r270 bottom
C6 "100nF" C0603 22.981,53.276 r270 bottom
C7 "1nF" C0603 8.011,3.2 r180 bottom
C8 "100nF" C0603 73.058,32.302 r180 bottom
C9 "10uF" C0603 73.058,33.927 r180 bottom
C10 "1uF" C0603 73.058,41.756 r0 bottom
C11 "10uF" C0603 73.058,40.063 r180 bottom
C12 "1uF" C0603 78.083,56.451 r0 top
C13 "100nF" C0603 63.89,45.958 r90 bottom
C14 "1uF" C0603 78.126,54.913 r180 top
C15 "22pf" C0603 63.215,43.715 r0 bottom
C16 "1uF" C0603 80.076,52.65 r90 top
C17 "22pf" C0603 66.187,43.715 r0 bottom
C18 "100nF" C0603 65.435,45.958 r90 bottom
C19 "1uF" C0603 76.648,53.05 r180 top
C20 "1uF" C0603 76.636,49.35 r180 top
C21 "1uF" C0603 74.185,49.295 r90 top
C22 "1uF" C0603 72.456,49.295 r90 top
C23 "100nF" C0603 71.4,58.702 r270 top
C24 "10uF" C0603 73.046,58.702 r270 top
C25 "100nF" C0603 57.926,52.65 r270 bottom
C26 "1uF" C0603 66.318,54.273 r270 bottom
C27 "1uF" C0603 70.152,53.019 r180 top
C28 "100nF" C0603 83.486,48.125 r0 top
C29 "10uF" C0603 83.418,46.469 r0 top
C30 "10uF" C0603 58.276,18.751 r180 bottom
C31 "100nF" C0603 58.276,17.377 r180 bottom
C32 "100nF" C0603 24.516,45.777 r0 bottom
C33 "10uF" C0603 24.549,44.263 r0 bottom
C34 "100nF" C0603 43.638,43.517 r180 top
C35 "10uF" C0603 43.603,45.122 r180 top
C36 "22pf" C0603 28.43,35.606 r90 top
C37 "22pf" C0603 23.219,35.611 r270 top
C38 "100nF" C0603 11.98,45.248 r90 bottom
C39 "100nF" C0603 18.926,44.65 r90 bottom
C40 "10uF" C0603 29.788,28.418 r90 top
C41 "100nF" C0603 31.36,28.423 r90 top
C42 "10uF" C0603 28.605,32.633 r270 top
C43 "100nF" C0603 22.341,27.972 r90 bottom
C44 "10uF" C0603 23.864,27.972 r90 bottom
C45 "100nF" C0603 30.152,32.633 r270 top
C46 "1pF/NC" C0402 73.671,8.95 r180 top
C47 "1uF" C0603 58.105,8.62 r90 top
C48 "100nF" C0603 35.873,3.03 r180 top
C49 "22pf" C0603 68.444,26.086 r180 top
C50 "22pf" C0603 68.444,27.754 r180 top
C51 "100nF" C0603 29.002,2.912 r180 top
C52 "100nF" C0603 53.6,50.6 r180 top
C53 "100nF" C0603 56.508,47.644 r90 top
C54 "100nF" C0603 61.615,48.244 r270 top
C55 "100nF" C0603 21.757,6.798 r180 top
C56 "10uF" C0603 16.952,18.699 r0 top
C57 "100nF" C0603 16.952,17.165 r0 top
C58 "1uF" C0603 11.728,16.532 r180 bottom
C59 "1uF" C0603 11.696,26.31 r180 bottom
C60 "1uF" C0603 11.846,36.371 r180 bottom
C61 "1pF/NC" C0402 72.581,12.75 r0 top
"Camera CSI interface1" "CONN FFC FPC 15POS 1mm BOTTOM CNT SMD R/A" FPC-SMD_15P-P1.00_XUNPU_FPC-1.0FX-15PWCR-H20 24.74,51.247 r270 top
CN1 "533980471" CONN-SMD_4P-P1.25_XUNPU_WAFER-GH1.25-4PWB 63.449,57.069 r0 bottom
CN2 "533980471" CONN-SMD_4P-P1.25_XUNPU_WAFER-GH1.25-4PWB 44.906,5.75 r0 top
CN3 "533980471" CONN-SMD_4P-P1.25_XUNPU_WAFER-GH1.25-4PWB 45.076,57.48 r0 bottom
D1 "DIODE ARR SCHOTTKY 30V SOT-23" SOT-23-3_L2.9-W1.3-P1.90-LS2.4-BR 41.688,8.846 r180 top
D2 "TVS DIODE 5VWM 18.6VC SOD-523" SOD-523_L1.2-W0.8-LS1.6-BI 52.825,7.486 r90 top
D3 "TVS DIODE 5VWM 18.6VC SOD-523" SOD-523_L1.2-W0.8-LS1.6-BI 50.892,52.207 r180 top
D4 "TVS DIODE 5VWM 18.6VC SOD-523" SOD-523_L1.2-W0.8-LS1.6-BI 50.844,53.381 r0 top
D5 "TVS DIODE 5VWM 18.6VC SOD-523" SOD-523_L1.2-W0.8-LS1.6-BI 12.316,30.95 r270 top
D6 "TVS DIODE 5VWM 18.6VC SOD-523" SOD-523_L1.2-W0.8-LS1.6-BI 12.296,33.45 r90 top
D7 "TVS DIODE 5VWM 18.6VC SOD-523" SOD-523_L1.2-W0.8-LS1.6-BI 50.874,54.494 r180 top
D8 "TVS DIODE 5VWM 18.6VC SOD-523" SOD-523_L1.2-W0.8-LS1.6-BI 12.676,23.358 r90 top
D9 "TVS DIODE 5VWM 18.6VC SOD-523" SOD-523_L1.2-W0.8-LS1.6-BI 12.676,20.82 r270 top
D10 "DIODE ZENER 5.6V 500mW LL-34" LL-34_L3.5-W1.5-RD 21.1,54 r90 bottom
D11 "TVS DIODE 5VWM 18.6VC SOD-523" SOD-523_L1.2-W0.8-LS1.6-BI 10.001,35.624 r270 bottom
D12 "TVS DIODE 5VWM 18.6VC SOD-523" SOD-523_L1.2-W0.8-LS1.6-BI 9.927,25.678 r270 bottom
D13 "TVS DIODE 5VWM 18.6VC SOD-523" SOD-523_L1.2-W0.8-LS1.6-BI 9.592,15.782 r270 bottom
"Display DSI interface1" "CONN FFC FPC 15POS 1mm BOTTOM CNT SMD R/A" FPC-SMD_15P-P1.00_XUNPU_FPC-1.0FX-15PWCR-H20 38.282,51.083 r270 top
F1 "10A" IND-SMD_L8.5-W3.1 38.333,51.104 r270 bottom
F2 "10A" IND-SMD_L8.5-W3.1 77.105,37.499 r90 bottom
F3 "10A" IND-SMD_L8.5-W3.1 69.173,37.052 r90 bottom
F4 "PTC RESET FUSE 24V 100mA 0603" F0603 47.824,52.129 r180 top
F5 "PTC RESET FUSE 24V 100mA 0603" F0603 47.824,54.447 r180 top
H1 "13X2" HDR-TH_26P-P2.54-V-M-R2-C13-S2.54 81.717,25.108 r90 top
HD1 "533980471" CONN-SMD_4P-P1.25_XUNPU_WAFER-GH1.25-4PWB 52.307,57.44 r180 top
Hole1 "Pad Big" "Screw 3.0" 3.566,3.509 r0 top value="Pad Big - Hole"
Hole2 "Pad Big" "Screw 3.0" 82.806,3.577 r0 top value="Pad Big - Hole"
Hole3 "Pad Big" "Screw 3.0" 82.822,59.497 r0 top value="Pad Big - Hole"
Hole4 "Pad Big" "Screw 3.0" 3.574,59.502 r0 top value="Pad Big - Hole"
IC1 "Low Power Mono Audio CODEC" WQFN-20_L3.0-W3.0-P0.40-BL-EP1.7 73.346,54.955 r180 top
IC2 "NS4150B 3.0W Mono Class-D Audio Power Amplifier" MSOP-8_L3.0-W3.0-P0.65-LS5.0-BL 62.089,52.4 r270 bottom
IC3 "Single Port Fast Ethernet Transceiver" QFN-32_L4.0-W4.0-P0.40-BL-EP2.7 26.659,32.129 r180 top
IC4 "Low-Power, Slew-Rate-Limited RS-485/RS-422 Transceivers" SOP-8_L4.9-W3.9-P1.27-LS6.0-BL 59.538,53.158 r90 top
IC5 "SINGLE 2-INPUT NAND GATE WITH SCHMITT-TRIGGER INPUTS" SOT-23-5_L3.0-W1.7-P0.95-LS2.8-BL 59.093,48.478 r0 top
IC6 "CH340" SOP-16_L10.0-W3.9-P1.27-LS6.0-BL 17.427,14.888 r180 top
L1 "2.2uH" IND-SMD_L5.4-W5.2 33.289,54.488 r270 bottom
L2 "2.2nH" C0402 73.124,10.905 r90 top
LED1 "XL-1608SURC-06" LED0603-RD_RED 41.406,52.158 r0 bottom
MIC1 "MSM381A3729H9CP" MIC-SMD_4P-L3.8-W3.0-P2.46-S1.70-TR 82.999,50.57 r270 top
Q1 "MOSFET P-CH 30V 4.3A SOT-23" 2SOT-23-3_L2.9-W1.6-P1.90-LS2.8-BR 50.361,7.585 r90 top
Q2 "MOSFET P-CH 30V 4.3A SOT-23" SOT-23-3_L2.9-W1.6-P1.90-LS2.8-BR 56.04,21.947 r0 bottom
Q3 "TRANS PNP 25V 1.5A SOT-23" SOT-23-3_L2.9-W1.3-P1.90-LS2.4-BR 59.226,44.468 r180 top
Q4 "TRANS NPN 25V 0.5A SOT-23" SOT-23-3_L2.9-W1.3-P1.90-LS2.4-BR 25.984,13.887 r90 top
Q5 "TRANS NPN 25V 0.5A SOT-23" SOT-23-3_L2.9-W1.3-P1.90-LS2.4-BR 27.68,9.998 r270 top
Q6 "MOSFET P-CH 30V 4.3A SOT-23" 2SOT-23-3_L2.9-W1.6-P1.90-LS2.8-BR 11.923,23.59 r180 bottom
Q7 "MOSFET P-CH 30V 4.3A SOT-23" 2SOT-23-3_L2.9-W1.6-P1.90-LS2.8-BR 12.18,33.427 r180 bottom
Q8 "MOSFET P-CH 30V 4.3A SOT-23" 2SOT-23-3_L2.9-W1.6-P1.90-LS2.8-BR 11.726,13.61 r180 bottom
Q9 "TRANS PNP 40V 200mA SOT-363" SC-70-6_L2.2-W1.3-P0.65-LS2.1-TL 14.971,23.628 r270 bottom
Q10 "TRANS PNP 40V 200mA SOT-363" SC-70-6_L2.2-W1.3-P0.65-LS2.1-TL 15.108,33.593 r270 bottom
Q11 "TRANS PNP 40V 200mA SOT-363" SC-70-6_L2.2-W1.3-P0.65-LS2.1-TL 14.967,13.887 r270 bottom
R1 "1kΩ" R0603 41.516,50.506 r180 bottom
R2 "10kΩ" R0603 24.726,56.85 r270 bottom
R3 "100kΩ" R0603 27.85,56.951 r90 bottom
R4 "22kΩ" R0603 26.304,56.951 r90 bottom
R5 "0Ω" R0603 31.626,59.67 r180 bottom
R6 "22kΩ" R0603 63.859,48.897 r90 bottom
R7 "10kΩ" R0603 75.775,58.102 r180 top
R8 "22kΩ" R0603 65.417,48.903 r90 bottom
R9 "0Ω" R0603 76.666,51.1 r0 top
R10 "100Ω" R0603 75.775,59.617 r180 top
R11 "0Ω" R0603 74.185,46.374 r270 top
R12 "0Ω" R0603 72.456,46.374 r270 top
R13 "10kΩ" R0603 64.009,54.998 r0 bottom
R14 "0Ω" R0603 70.099,51.198 r180 top
R15 "0Ω" R0603 82.568,53.255 r0 top
R16 "0Ω" R0603 69.346,48.822 r90 top
R17 "0Ω" R0603 46.532,8.986 r90 top
R18 "0Ω" R0603 44.977,9.015 r90 top
R19 "1kΩ" R0603 40.25,6.279 r90 top
R20 "0Ω" R0603 58.771,22.239 r90 bottom
R21 "5.1KΩ" R0603 52.995,18.038 r270 bottom
R22 "5.1KΩ" R0603 54.523,18.062 r270 bottom
R23 "0Ω" R0603 60.285,22.239 r90 bottom
R24 "5.1KΩ" R0603 56.03,18.096 r270 bottom
R25 "5.1KΩ" R0603 60.484,18.013 r270 bottom
R26 "10kΩ" R0603 53.409,22.05 r90 bottom
R27 "5.1KΩ" R0603 61.951,18.049 r270 bottom
R28 "5.1KΩ" R0603 63.466,18.075 r270 bottom
R29 "10kΩ" R0603 30.093,46.502 r180 bottom
R30 "10kΩ" R0603 30.093,44.942 r180 bottom
R31 "2k2Ω" R0603 31.473,46.863 r0 top
R32 "0Ω" R0603 31.451,45.274 r180 top
R33 "2k2Ω" R0603 31.456,42.119 r0 top
R34 "0Ω" R0603 31.463,43.65 r180 top
R35 "0Ω" R0603 43.493,48.036 r180 top
R36 "0Ω" R0603 43.512,46.489 r180 top
R37 "0Ω" R0603 29.466,60.48 r270 bottom
R38 "1.5kΩ" R0603 26.802,24.624 r270 top
R39 "1kΩ" R0603 3.566,48.853 r180 bottom
R40 "1kΩ" R0603 3.677,45.234 r180 bottom
R41 "5.1KΩ" R0603 19.586,37.28 r180 top
R42 "5.1KΩ" R0603 24.505,24.624 r270 top
R43 "5.1KΩ" R0603 28.419,24.664 r270 top
R44 "5.1KΩ" R0603 22.903,24.663 r270 top
R45 "5.1KΩ" R0603 30.544,36.11 r90 top
R46 "5.1KΩ" R0603 19.426,33.9 r180 top
R47 "6.19KΩ" R0603 29.983,24.664 r90 top
R48 "5.1KΩ" R0603 19.416,35.53 r180 top
R49 "0Ω" R0402 67.759,14.752 r180 top
R50 "10kΩ" R0603 35.019,13.928 r0 top
R51 "10kΩ" R0603 59.654,8.635 r270 top
R52 "10kΩ" R0603 38.716,5.06 r270 top
R53 "10kΩ" R0603 31.766,4.84 r270 top
R54 "5.1KΩ" R0603 68.455,35.039 r0 top
R55 "10kΩ" R0603 53.657,52.156 r0 top
R56 "0Ω" R0603 65.207,51.084 r180 top
R57 "5.1KΩ" R0603 10.386,33.81 r180 top
R58 "5.1KΩ" R0603 53.701,53.785 r180 top
R59 "0Ω" R0603 65.015,54.019 r180 top
R60 "5.1KΩ" R0603 10.562,23.804 r180 top
R61 "5.1KΩ" R0603 10.386,30.813 r180 top
R62 "0Ω" R0603 65.015,55.661 r180 top
R63 "10kΩ" R0603 53.652,55.337 r0 top
R64 "5.1KΩ" R0603 10.636,20.357 r180 top
R65 "2k2Ω" R0603 56.635,44.725 r270 top
R66 "2k2Ω" R0603 62.048,44.584 r90 top
R67 "10kΩ" R0603 25.167,9.963 r90 top
R68 "5.1KΩ" R0603 10.614,14.366 r270 top
R69 "10kΩ" R0603 28.6,13.9 r270 top
R70 "5.1KΩ" R0603 10.607,9.838 r90 top
R71 "10kΩ" R0603 14.993,20.801 r180 bottom
R72 "51kΩ" R0603 12.873,20.24 r90 bottom
R73 "10kΩ" R0603 14.936,30.69 r180 bottom
R74 "51kΩ" R0603 12.627,29.771 r90 bottom
R75 "10kΩ" R0603 14.967,10.7 r180 bottom
R76 "51kΩ" R0603 12.676,9.785 r90 bottom
R77 "0Ω" R0402 46.965,29.463 r225 bottom
R78 "0Ω" R0402 47.985,32.05 r45 bottom
R79 "1MΩ" R0603 8.576,56.918 r270 top
R80 "1MΩ" R0603 8,4.8 r180 bottom
SS "CONN MOD JACK RJ45 TH" RJ45-TH_HR913550A 7.316,47.007 r90 top (schematic designator RJ1)
SW1 "B3U-1000P" KEY-SMD_B3U-1000PM 35.5,5.3 r0 top
SW2 "B3U-1000P" KEY-SMD_B3U-1000PM 28.799,5.122 r0 top
TF1 "CONN MICRO SD CARD (TF CARD) SMD" TF-SMD_SH_SH-TF-01B 56.658,7.039 r180 bottom
U1 "TLV62569DBVR" SOT-23-5_L3.0-W1.7-P0.95-LS2.8-BR 27.985,53.506 r90 bottom
U2 "ESP32P4_QFN104" JC-ESP32P4-M3_V0.2 52.22,25.582 r180 top
USB1 "TYPE C 2.0" USB-C-SMD_G-SWITCH_GT-USB-7010ASV 3.466,32.681 r270 top
USB2 "TYPE C 2.0" USB-C-SMD_G-SWITCH_GT-USB-7010ASV 3.466,22.608 r270 top
USB3 "TYPE C 2.0" USB-C-SMD_G-SWITCH_GT-USB-7010ASV 3.466,12.71 r270 top
ZJP1 "533980471" CONN-SMD_4P-P1.25_XUNPU_WAFER-GH1.25-4PWB 63.607,57.44 r180 top

## Footprints (in the part's own frame and the unit in brackets; to place one, negate y for a bottom-side part, rotate by r counter-clockwise, add the part's x,y. Pads: shape width x height; smd on the part's side, far side on the other; paste and mask are expansions set on the pad)
2SOT-23-3_L2.9-W1.6-P1.90-LS2.8-BR [mm] "225mW 45V 160@500mA,1.0V 500mA NPN SOT-23 Single Bipolar Transistors ROHS"
  rect 0.6x1.07 smd paste+0 mask+0.051: 1(-0.95,-1.235) 2(0.95,-1.235) 3(0,1.235)
  silkscreen extent -1.59,-0.88 1.6,0.88, body extent -1.45,-1.14 1.45,1.16, height 1
ANT-SMD-2_L3.2-W1.6-C504002 [mm] "1206"
  rect 1.485x1.728 smd paste+0 mask+0.051: 1(-1.611,-0.001) 2(1.574,0)
  silkscreen extent -2.66,-1.13 2.61,1.13, body extent -1.5,-0.8 1.7,0.8, height 1.22
C0402 [mm] "cap"
  rect 0.79x0.54 smd paste+0 mask+0.05: 1(-0.545,0) 2(0.545,0)
  silkscreen extent -1.17,-0.5 1.17,0.5, body extent -0.52,-0.27 0.52,0.26, height 0.53
C0603 [mm] "cap 0603"
  rect 0.8x0.9 smd paste+0 mask+0.051: 1(-0.7,0) 2(0.7,0)
  silkscreen extent -1.39,-0.71 1.39,0.71, body extent -0.81,-0.4 0.79,0.4, height 0.8
CONN-SMD_4P-P1.25_XUNPU_WAFER-GH1.25-4PWB [mm] "4P PicoBlade(MX 1.25) 1x4P Tin -40℃~+105℃ White 1.25mm 125V 4 1A 1 Surface Mount,Vertical SMD,P=1.25mm Headers, Male Pins RoHS"
  rect 0.8x1.3 smd paste+0.102 mask+0.051: 1(0,0) 2(1.25,0) 3(2.5,0) 4(3.75,0)
  rect 2.1x3 smd paste+0.102 mask+0.051: 5(6.3,-2.75) 6(-2.55,-2.75)
  silkscreen extent -1.51,-3.98 5.26,-0.18, body extent -3.21,-3.86 6.94,0.34, height 4.7
CRYSTAL-SMD_4P-L3.2-W2.5-BL [mm] "SMD3225-4P"
  rect 1.4x1.2 smd paste+0 mask+0.051: 1(-0.986,-0.736) 2(1.214,-0.736) 3(1.214,0.964) 4(-0.986,0.964)
  silkscreen extent -2.14,-1.79 2.18,1.82, body extent -1.6,-1.25 1.6,1.25, height 1.05
F0603 [mm] "PTC RESET FUSE 24V 100mA 0603"
  rect 0.806x0.864 smd paste-100 mask+0.051: 1(-0.742,0) 2(0.765,0)
  silkscreen extent -1.47,-0.76 1.49,0.75, body extent -0.85,-0.46 0.85,0.46, height 0.71
FPC-SMD_15P-P1.00_XUNPU_FPC-1.0FX-15PWCR-H20 [mm] "SMD,P=1mm,Surface Mount,Right Angle"
  rect 0.5x1.5 smd paste+0 mask+0.05: 1(-7,2.514) 2(-6,2.513) 3(-5,2.513) 4(-4,2.513) 5(-3,2.513) 6(-2,2.513) 7(-1,2.513) 8(0,2.513) 9(1,2.513) 10(2,2.513) 11(3,2.513) 12(4,2.513) 13(5,2.513) 14(6,2.513) 15(7,2.513)
  rect 2x1.7 smd paste+0 mask+0.05: 16(9.2,0.071) 17(-9.2,-0.086)
  silkscreen extent -9.95,-3.14 9.95,2.06, body extent -10.03,-3.32 10.03,3.12, height 2.25
HDR-TH_26P-P2.54-V-M-R2-C13-S2.54 [mm]
  rect 1.8x1.8 hole 1.1 paste-2539.97 mask+0.051: 1(-15.24,-1.27)
  round 1.8 hole 1.1 paste-2539.97 mask+0.051: 2(-15.24,1.27) 3(-12.7,-1.27) 4(-12.7,1.27) 5(-10.16,-1.27) 6(-10.16,1.27) 7(-7.62,-1.27) 8(-7.62,1.27) 9(-5.08,-1.27) 10(-5.08,1.27) 11(-2.54,-1.27) 12(-2.54,1.27) 13(0,-1.27) 14(0,1.27) 15(2.54,-1.27) 16(2.54,1.27) 17(5.08,-1.27) 18(5.08,1.27) 19(7.62,-1.27) 20(7.62,1.27) 21(10.16,-1.27) 22(10.16,1.27) 23(12.7,-1.27) 24(12.7,1.27) 25(15.24,-1.27) 26(15.24,1.27)
  silkscreen extent -16.64,-2.65 16.66,2.61
IND-SMD_L5.4-W5.2 [mm]
  rect 1.9x2.5 smd paste+0 mask+0.051: 1(2.05,0) 2(-2.05,0)
  silkscreen extent -2.78,-2.68 2.78,2.68, body extent -2.65,-2.6 2.95,2.6, height 2.95
IND-SMD_L8.5-W3.1 [mm] "SMD,8.5x3.1mm.FERRITE BEAD 100Ω SMD 1LN"
  rect 2.52x4.06 smd paste+0 mask+0.051: 1(-4.27,0) 2(4.27,0)
  silkscreen extent -2.65,-1.66 2.63,1.64, body extent -4.25,-1.53 4.25,1.53, height 2.48
JC-ESP32P4-M3_V0.2 [mm]
  rect 1.2x0.75 smd mask+0.1: 1(-13.5,12.1) 2(-13.5,10.83) 3(-13.5,9.56) 4(-13.5,8.29) 5(-13.5,7.02) 6(-13.5,5.75) 7(-13.5,4.48) 8(-13.5,3.21) 9(-13.5,1.94) 10(-13.5,0.67) 11(-13.5,-0.6) 12(-13.5,-1.87) 13(-13.5,-3.14) 14(-13.5,-4.41) 15(-13.5,-5.68) 16(-13.5,-6.95) 17(-13.5,-8.22) 18(-13.5,-9.49) 19(-13.5,-10.76) 20(-13.5,-12.03) 41(13.5,-12.09) 42(13.5,-10.82) 43(13.5,-9.55) 44(13.5,-8.28) 45(13.5,-7.01) 46(13.5,-5.74) 47(13.5,-4.47) 48(13.5,-3.2) 49(13.5,-1.93) 50(13.5,-0.66) 51(13.5,0.61) 52(13.5,1.88) 53(13.5,3.15) 54(13.5,4.42) 55(13.5,5.69) 56(13.5,6.96) 57(13.5,8.23) 58(13.5,9.5) 59(13.5,10.77) 60(13.5,12.04)
  rect 0.75x1.2 smd mask+0.1: 21(-12.09,-13.5) 22(-10.82,-13.5) 23(-9.55,-13.5) 24(-8.28,-13.5) 25(-7.01,-13.5) 26(-5.74,-13.5) 27(-4.47,-13.5) 28(-3.2,-13.5) 29(-1.93,-13.5) 30(-0.66,-13.5) 31(0.61,-13.5) 32(1.88,-13.5) 33(3.15,-13.5) 34(4.42,-13.5) 35(5.69,-13.5) 36(6.96,-13.5) 37(8.23,-13.5) 38(9.5,-13.5) 39(10.77,-13.5) 40(12.04,-13.5) 61(12.07,13.5) 62(10.8,13.5) 63(9.53,13.5) 64(8.26,13.5) 65(6.99,13.5) 66(5.72,13.5) 67(4.45,13.5) 68(3.18,13.5) 69(1.91,13.5) 70(0.64,13.5) 71(-0.63,13.5) 72(-1.9,13.5) 73(-3.17,13.5) 74(-4.44,13.5) 75(-5.71,13.5) 76(-6.98,13.5) 77(-8.25,13.5) 78(-9.52,13.5) 79(-10.79,13.5) 80(-12.06,13.5)
  silkscreen extent -15.13,-15.13 15.13,15.13, body extent -13.53,-13.51 13.45,13.46, height 2.01
KEY-SMD_B3U-1000PM [mm]
  rect 0.8x1.7 smd paste+0 mask+0.051: 1(-1.7,0) 2(1.7,0)
  silkscreen extent -1.5,-1.25 1.5,1.25, body extent -2,-1.25 2,1.25, height 1.75
LED0603-RD_RED [mm] "LED RED"
  rect 0.8x0.8 smd paste+0 mask+0.051: 1(-0.75,-0.009) 2(0.849,-0.002)
  silkscreen extent -1.44,-0.75 1.51,0.75, body extent -0.7,-0.41 0.9,0.39, height 0.7
LL-34_L3.5-W1.5-RD [mm]
  rect 1.1x1.7 smd paste+0 mask+0.051: 1(-1.6,0) 2(1.6,0)
  silkscreen extent -0.75,-0.76 0.72,0.75, body extent -1.75,-0.75 1.75,0.72, height 1.52
MIC-SMD_4P-L3.8-W3.0-P2.46-S1.70-TR [mm] "OCLGA-4(3x3.8)"
  round 0.8 smd paste+0 mask+0.051: 1(0.66,1.23) 2(0.66,-1.23) 3(-1.041,-1.23) 4(-1.041,1.23)
  silkscreen extent -1.81,-1.97 1.45,1.99, body extent -1.63,-1.83 1.33,1.93, height 1.3
MSOP-8_L3.0-W3.0-P0.65-LS5.0-BL [mm] "MSOP-8"
  oval 0.364x1.692 smd paste+0 mask+0.051: 1(-0.939,-2.142) 2(-0.289,-2.142) 3(0.361,-2.142) 4(1.011,-2.142) 5(1.011,2.15) 6(0.361,2.15) 7(-0.289,2.15) 8(-0.939,2.15)
  silkscreen extent -1.69,-1.65 1.69,1.73, body extent -1.5,-2.45 1.5,2.45, height 0.94
QFN-32_L4.0-W4.0-P0.40-BL-EP2.7 [mm]
  rect 0.2x0.6 smd paste+0 mask+0.05: 1(0,0) 2(0.4,0) 3(0.8,0) 6(2,0) 7(2.4,0) 8(2.8,0) 17(2.8,4) 18(2.4,4) 19(2,4) 22(0.8,4) 23(0.4,4) 24(0,4)
  rect 0.2x0.6 smd paste+0 mask+0.049: 4(1.2,0) 5(1.6,0) 20(1.6,4) 21(1.2,4)
  rect 0.6x0.2 smd paste+0 mask+0.05: 9(3.4,0.6) 10(3.4,1) 11(3.4,1.4) 14(3.4,2.6) 15(3.4,3) 16(3.4,3.4) 25(-0.6,3.4) 26(-0.6,3) 27(-0.6,2.6) 30(-0.6,1.4) 31(-0.6,1) 32(-0.6,0.6)
  rect 0.6x0.2 smd paste+0 mask+0.049: 12(3.4,1.8) 13(3.4,2.2) 28(-0.6,2.2) 29(-0.6,1.8)
  rect 2.8x2.8 smd paste+0 mask+0.05: 33(1.4,2)
  silkscreen extent -1.33,-0.72 4.13,4.73, body extent -0.65,-0.05 3.45,4.05, height 0.55
R0402 [mm] "0402"
  rect 0.566x0.54 smd paste-100 mask+0.051: 1(-0.433,0) 2(0.433,0)
  silkscreen extent -0.94,-0.5 0.94,0.5, body extent -0.54,-0.27 0.53,0.28, height 0.41
R0603 [mm] "Resister pakage 0603"
  rect 0.806x0.864 smd paste-100 mask+0.051: 1(-0.753,0) 2(0.753,0)
  silkscreen extent -1.4,-0.69 1.4,0.68, body extent -0.8,-0.43 0.8,0.43, height 0.48
RJ45-TH_HR913550A [mm] "CONN MOD JACK RJ45 TH"
  rect 1.524x1.524 hole 0.9 paste-2539.97 mask+0.051: 1(4.44,-6.476)
  round 1.524 hole 0.9 paste-2539.97 mask+0.051: 2(3.18,-9.016) 3(1.9,-6.476) 4(0.64,-9.016) 5(-0.64,-6.476) 6(-1.9,-9.016) 7(-3.18,-6.476) 8(-4.44,-9.016)
  round 2 hole 1.02 paste-2539.97 mask+0.051: 9(6.625,4.774) 10(4.085,4.774) 11(-4.085,4.774) 12(-6.625,4.774)
  round 2.4 hole 1.5 paste-2539.97 mask+0.051: 13(7.75,-3.176) 14(-7.75,-3.176)
  round 3.25 hole 3.25 unplated paste-2539.97: ""(-5.71,-0.126) ""(5.71,-0.126)
  silkscreen extent -8,-10.81 8,10.8, body extent -8.21,-10.65 8.25,10.94, height 13.92
SC-70-6_L2.2-W1.3-P0.65-LS2.1-TL [mm] "SOT-363"
  rect 0.78x0.35 smd paste+0 mask+0.051: 1(-0.937,0.628) 2(-0.937,-0.022) 3(-0.937,-0.671) 4(0.963,-0.671) 5(0.963,-0.022) 6(0.963,0.628)
  silkscreen extent -1.25,-1.17 0.73,1.17, body extent -1.06,-1.13 1.15,1.08, height 1.09
"Screw 3.0" [mm]
  round 3.2 hole 3.2 mask+0.1: 1(0,0)
  silkscreen extent -4,-4 4,4, body extent -2.5,-2.5 2.5,2.5, height 1.73
SOD-523_L1.2-W0.8-LS1.6-BI [mm] "9.4A@8/20us 18.6V 7.8V 5V SOD-523 TVS Diodes RoHS"
  rect 0.6x0.4 smd paste+0 mask+0.051: 1(-0.75,0) 2(0.75,0)
  silkscreen extent -0.63,-0.45 0.68,0.45, body extent -0.8,-0.41 0.8,0.39, height 0.7
SOP-8_L4.9-W3.9-P1.27-LS6.0-BL [mm] "SOIC-8"
  oval 0.63x1.865 smd paste+0 mask+0.05: 1(-1.905,-2.682) 2(-0.635,-2.682) 3(0.635,-2.682) 4(1.905,-2.682) 5(1.905,2.682) 6(0.635,2.682) 7(-0.635,2.682) 8(-1.905,2.682)
  silkscreen extent -2.62,-4 2.5,1.35, body extent -2.5,-3.2 2.5,3
SOP-16_L10.0-W3.9-P1.27-LS6.0-BL [mm] "SOP-16"
  oval 0.56x1.745 smd paste+0 mask+0.051: 1(-5.08,0) 2(-3.81,0) 3(-2.54,0) 4(-1.27,0) 5(0,0) 6(1.27,0) 7(2.54,0) 8(3.81,0) 9(3.81,5.745) 10(2.54,5.745) 11(1.27,5.745) 12(0,5.745) 13(-1.27,5.745) 14(-2.54,5.745) 15(-3.81,5.745) 16(-5.08,5.745)
  silkscreen extent -5.76,-1.45 4.44,7.18, body extent -5.57,-0.23 4.43,5.77, height 1.8
SOT-23-3_L2.9-W1.3-P1.90-LS2.4-BR [mm] "DIODE ARR SCHOTTKY 30V SOT-23"
  rect 0.7x1.25 smd paste+0 mask+0.051: 1(-0.95,-1) 2(0.95,-1) 3(0,1)
  silkscreen extent -1.66,-0.73 1.66,0.74, body extent -1.52,-1.25 1.52,1.35, height 1.2
SOT-23-3_L2.9-W1.6-P1.90-LS2.8-BR [mm]
  rect 0.6x1.07 smd paste+0 mask+0.051: 1(-0.95,-1.235) 2(0.95,-1.235) 3(0,1.235)
  silkscreen extent -1.54,-0.88 1.54,0.88, body extent -1.5,-1.28 1.54,1.32, height 1.2
SOT-23-5_L3.0-W1.7-P0.95-LS2.8-BL [mm] "SOT-23-5"
  rect 0.49x1.157 smd paste+0 mask+0.05: 1(-0.95,-1.154) 2(0,-1.154) 3(0.95,-1.154)
  rect 0.49x1.175 smd paste+0 mask+0.05: 4(0.95,1.154) 5(-0.95,1.154)
  silkscreen extent -1.57,-0.86 1.58,0.85, body extent -1.5,-1.3 1.5,1.2, height 1.05
SOT-23-5_L3.0-W1.7-P0.95-LS2.8-BR [mm] "1.5MHz 2A Buck Adjustable 600mV~5.5V 1 SOT-23-5 Voltage Regulators - DC DC Switching Regulators RoHS"
  rect 0.6x1.1 smd paste+0 mask+0.051: 1(0.95,1.3) 2(0,1.3) 3(-0.95,1.3) 4(-0.95,-1.3) 5(0.95,-1.3)
  silkscreen extent -1.58,-0.49 1.61,2.2, body extent -1.45,-1.4 1.45,1.4, height 1.45
TF-SMD_SH_SH-TF-01B [mm] "CONN MICRO SD CARD (TF CARD) SMD"
  rect 0.7x1.6 smd paste+0 mask+0.05: 1(2.25,7.164) 2(1.15,7.164) 3(0.05,7.164) 4(-1.05,7.164) 5(-2.15,7.164) 6(-3.25,7.164) 7(-4.35,7.164) 8(-5.45,7.164) 9(-6.55,7.164)
  rect 1.2x1.5 smd paste+0 mask+0.05: 10(-7.75,6.164)
  rect 1.2x2.2 smd paste+0 mask+0.05: 11(-7.75,-3.436) 12(7.75,-3.436)
  rect 1.6x1.5 smd paste+0 mask+0.05: 13(6.85,6.164)
  round 1 hole 1 unplated paste-2539.97: ""(-4.95,-3.836) ""(3.05,-3.836)
  silkscreen extent -7.4,-7.84 7.4,8.35, body extent -8.05,-7.61 8.05,7.59, height 2
USB-C-SMD_G-SWITCH_GT-USB-7010ASV [mm] "CONN RCPT USB 2.0 Type-C 16POS SMD R/A"
  oval 1x2.1 hole 0.8 slot 1.7 at 90 deg paste-2539.97 mask+0.05: 1(-4.32,2.849) 2(4.32,2.849)
  oval 1x1.8 hole 0.8 slot 1.4 at 90 deg paste-2539.97 mask+0.05: 3(4.32,-1.332) 4(-4.32,-1.332)
  rect 0.6x1.24 smd paste+0 mask+0.049: A1B12(-3.2,3.469) A4B9(-2.4,3.469) B1A12(3.2,3.469) B4A9(2.4,3.469)
  rect 0.3x1.24 smd paste+0 mask+0.049: A5(-1.25,3.469) A6(-0.25,3.469) A7(0.25,3.469) A8(1.25,3.469) B5(1.75,3.469) B6(0.75,3.469) B7(-0.75,3.469) B8(-1.75,3.469)
  round 0.65 hole 0.65 unplated paste-2539.97 mask+0.102: ""(-2.9,2.349) ""(2.89,2.349)
  silkscreen extent -4.5,-3.77 4.51,1.43, body extent -4.79,-3.89 4.79,3.82, height 3.28
WQFN-20_L3.0-W3.0-P0.40-BL-EP1.7 [mm] "QFN-20-EP(3x3)"
  rect 0.2x0.8 smd paste+0 mask+0.05: 1(-0.8,-1.5) 2(-0.4,-1.5) 3(0,-1.5) 4(0.4,-1.5) 5(0.8,-1.5) 11(0.8,1.5) 12(0.4,1.5) 13(0,1.5) 14(-0.4,1.5) 15(-0.8,1.5)
  rect 0.8x0.2 smd paste+0 mask+0.05: 6(1.5,-0.8) 7(1.5,-0.4) 10(1.5,0.8) 16(-1.5,0.8) 19(-1.5,-0.4) 20(-1.5,-0.8)
  rect 0.8x0.2 smd paste+0 mask+0.049: 8(1.5,0) 9(1.5,0.4) 17(-1.5,0.4) 18(-1.5,0)
  rect 1.7x1.7 smd paste+0 mask+0.05: 21(0,0)
  silkscreen extent -1.55,-2.22 1.55,1.57, body extent -1.5,-1.49 1.5,1.51, height 0.8